# EAGLE board SparkFun LoRaSerial 915MHz - 1W-Panel (EAGLE 9.6.2), part 1 of 5
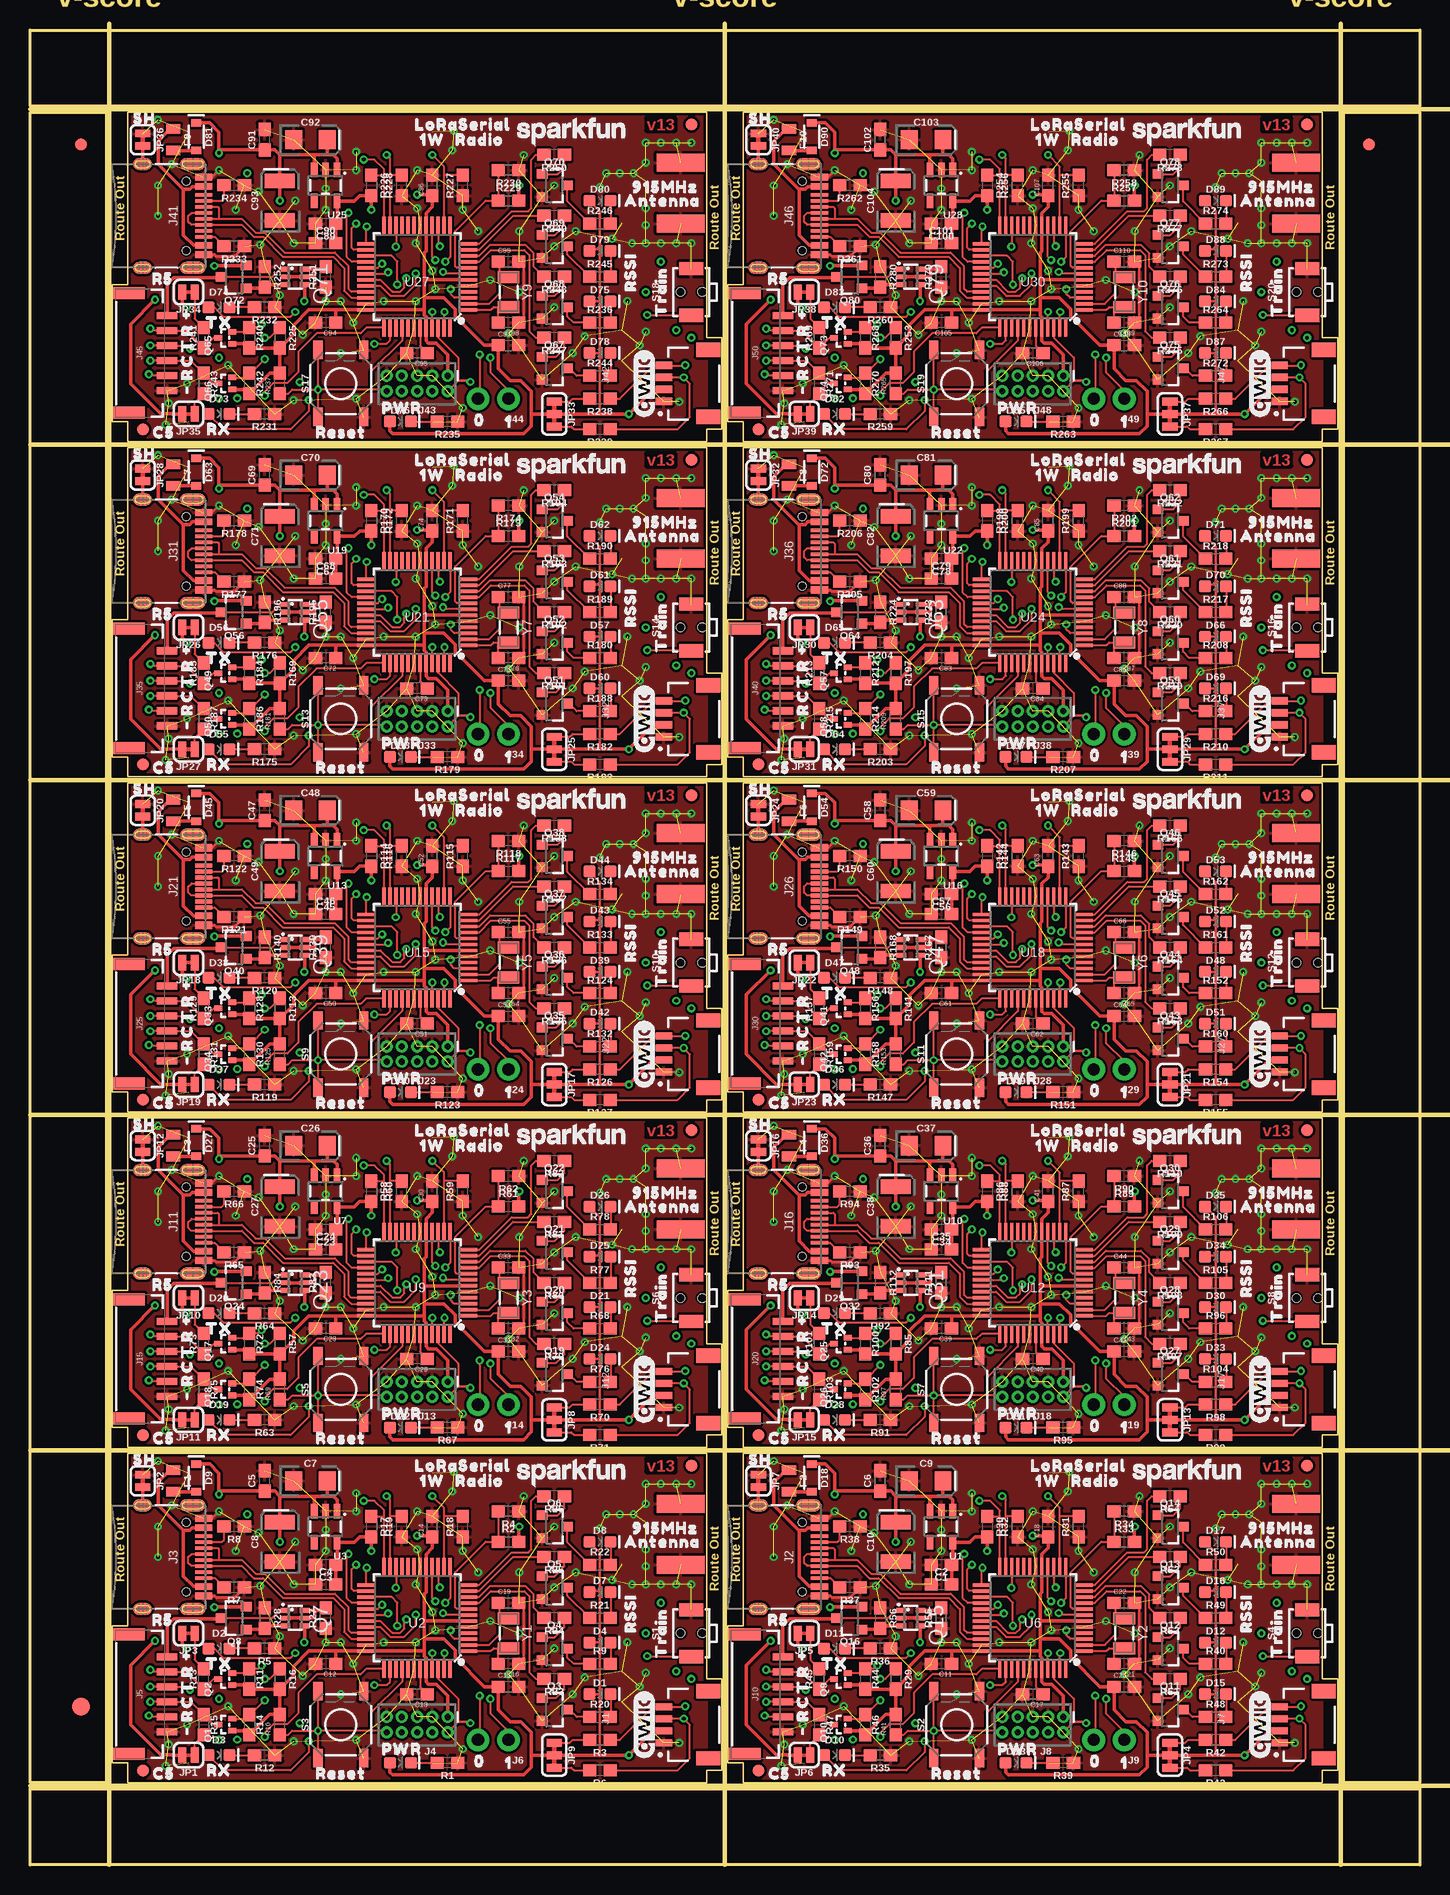
[diagram p0: board, top side]
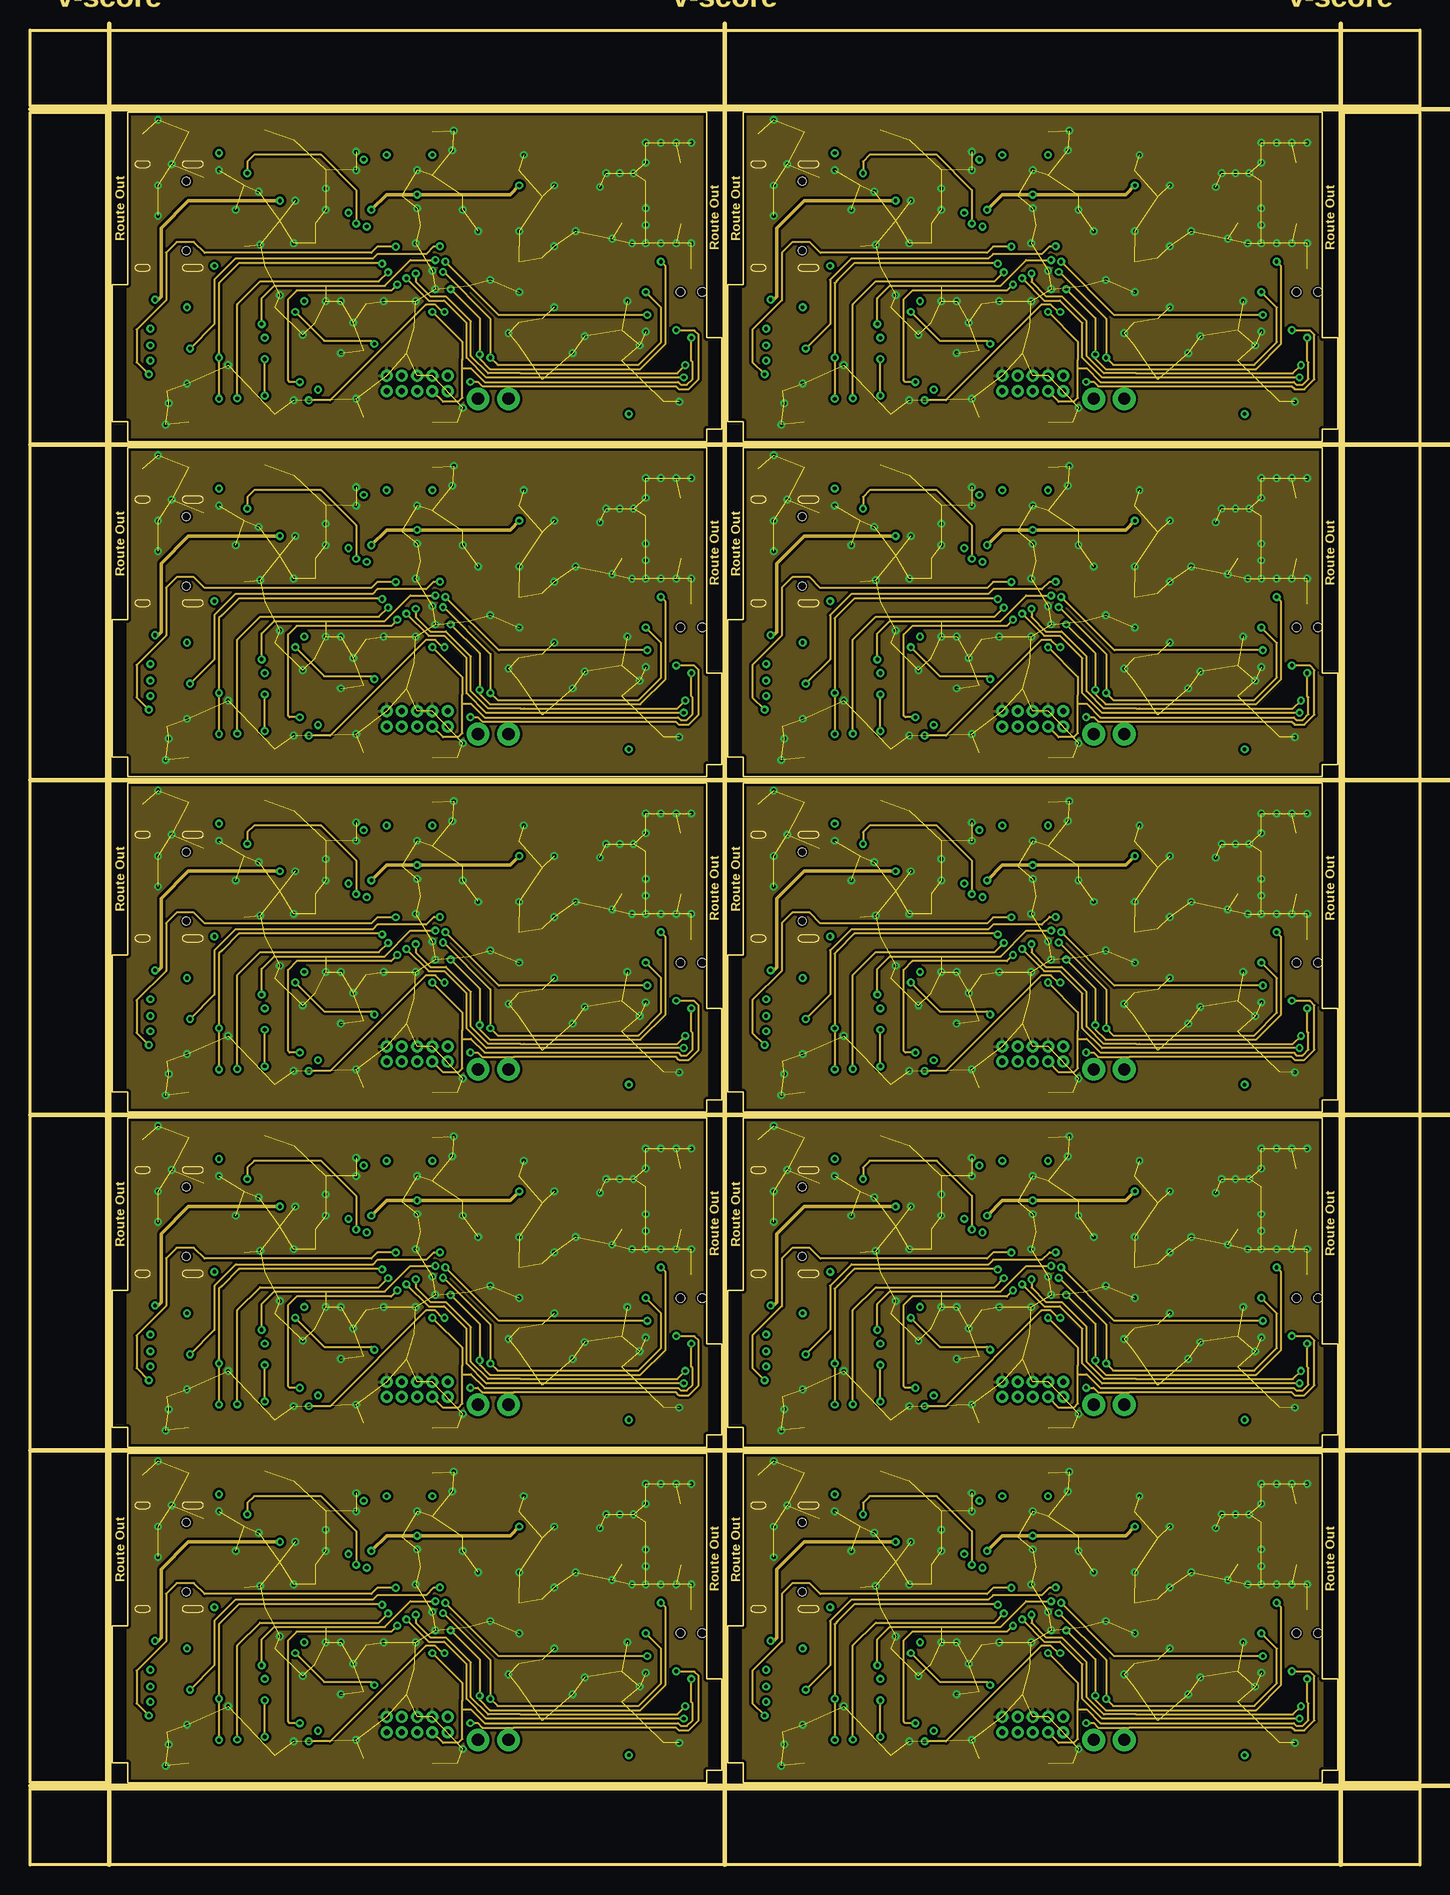
[diagram p1: board, inner layer Route2]
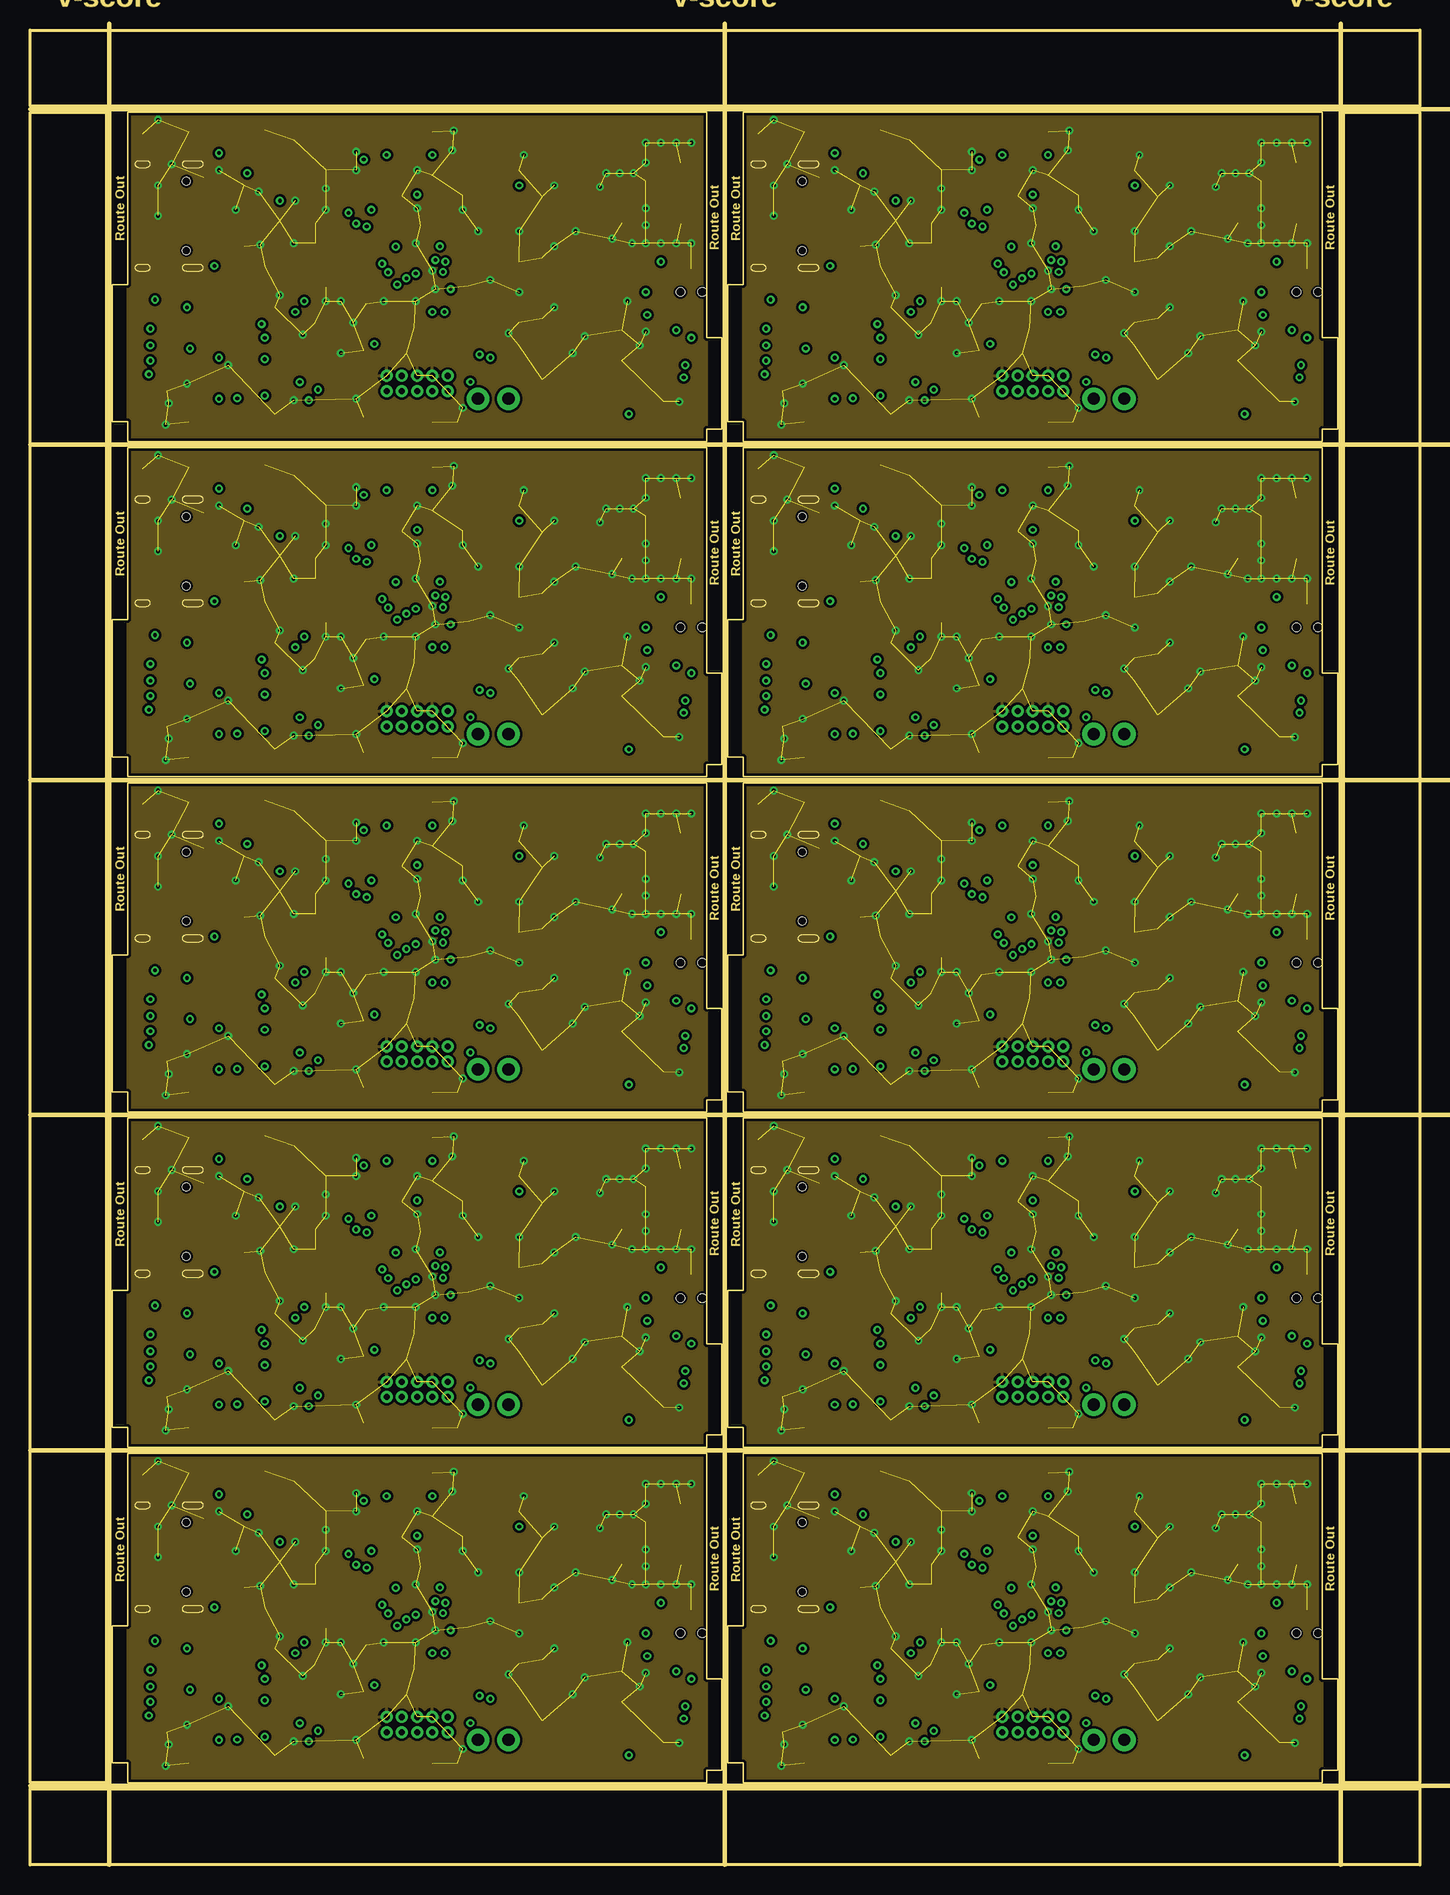
[diagram p2: board, inner layer Route15]
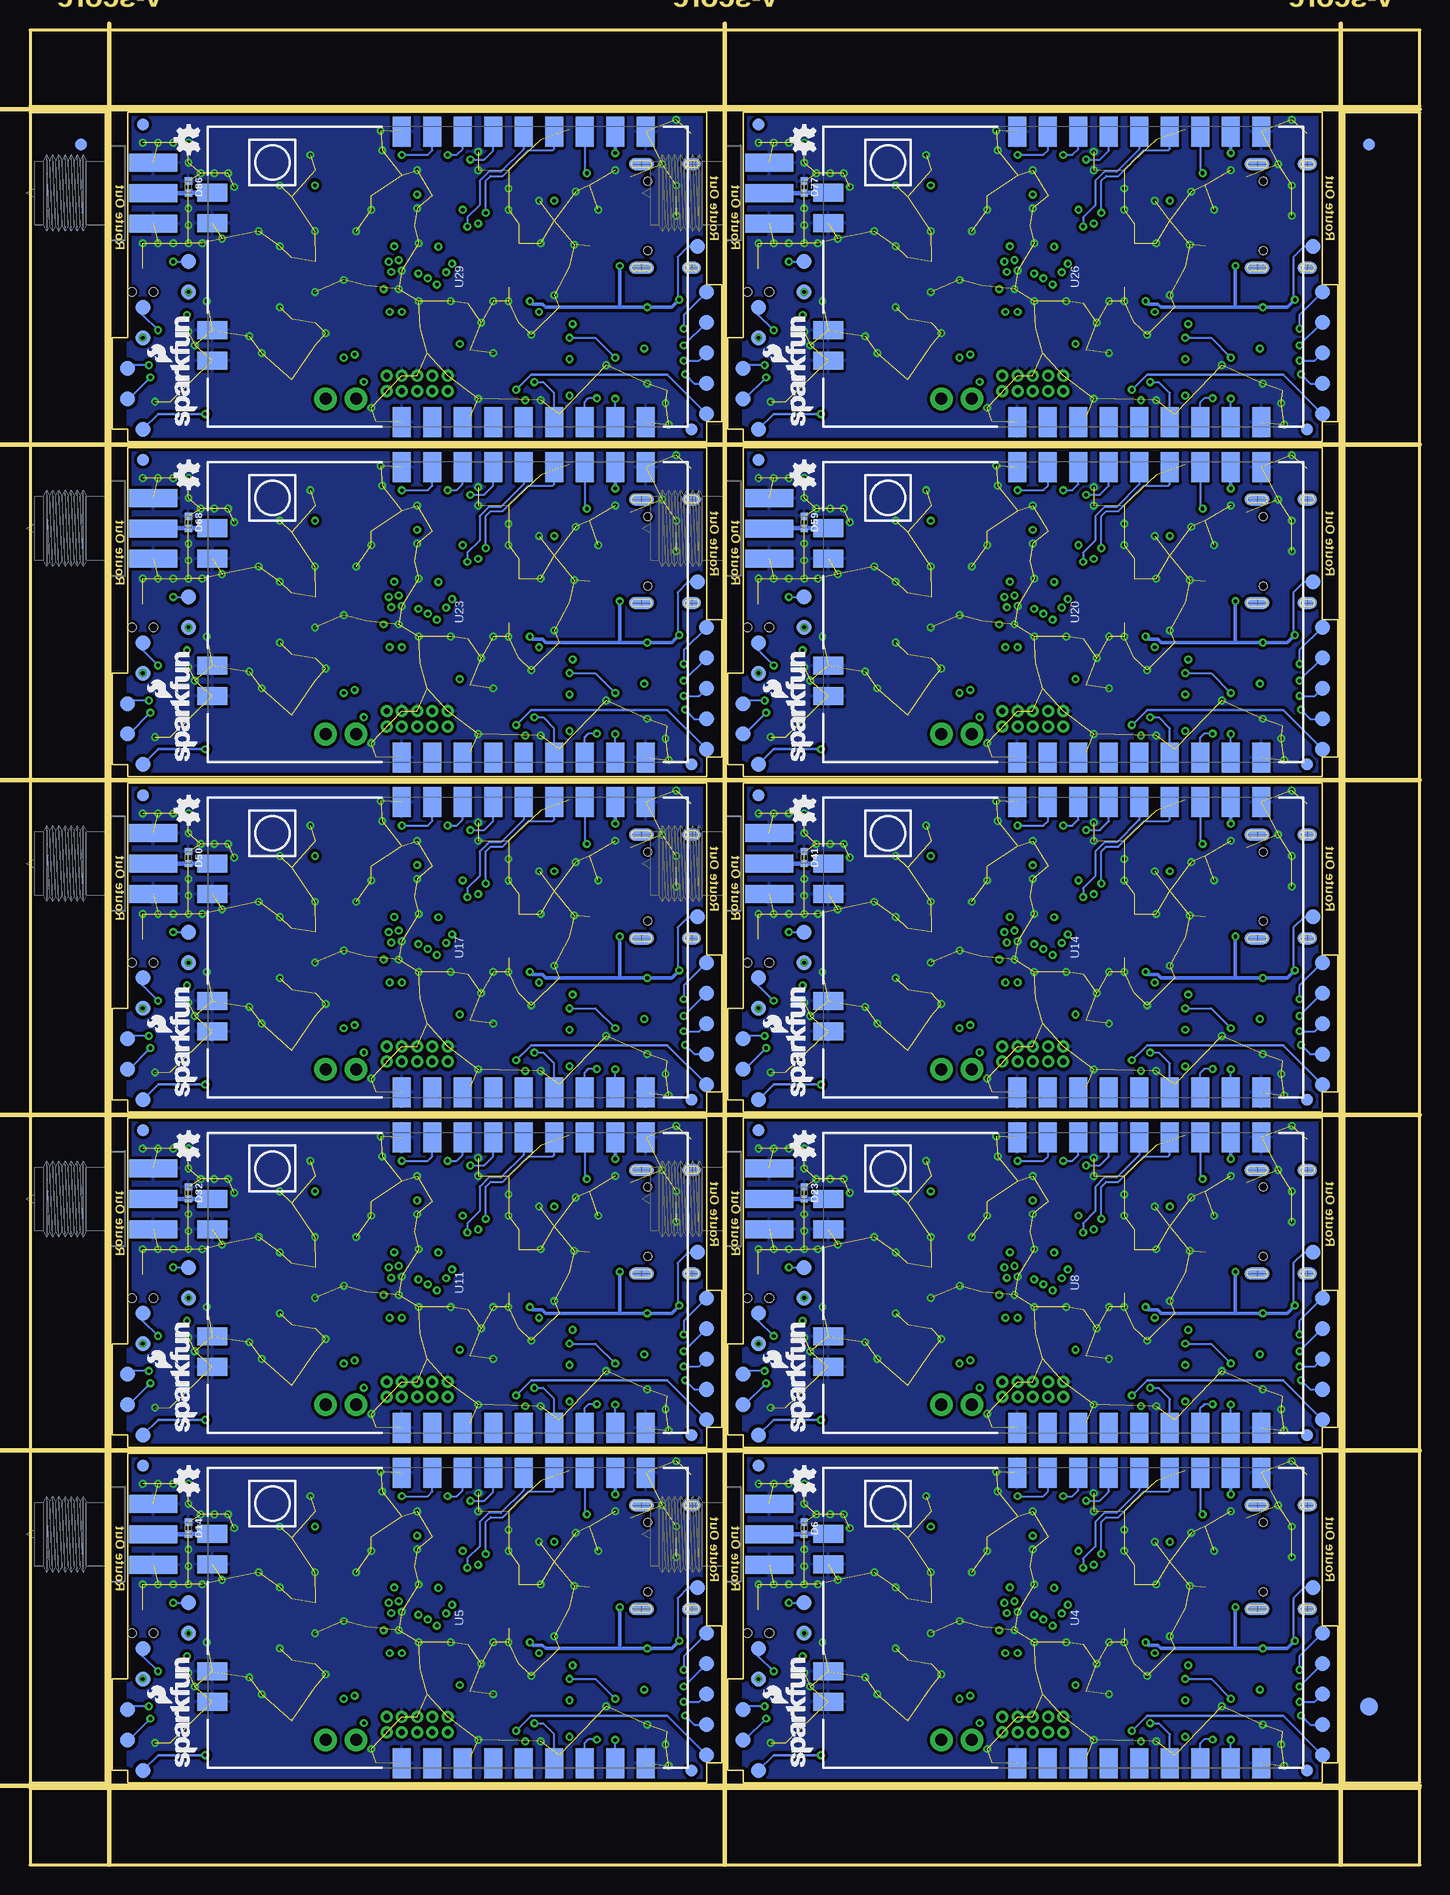
[diagram p3: board, bottom side, seen from below]

Size 115.82 x 152.95 mm. Coordinates in mm from the lower left corner, seen from the top.
Outline: 8.13,6.86 8.13,8.51 6.86,8.51 6.86,19.94 8.13,19.94 8.13,34.3 56.39,34.3 56.39,15.5 57.66,15.5 57.66,7.88 56.39,7.88 56.39,6.86 8.13,6.86
Outline: 59.44,6.86 59.44,8.51 58.17,8.51 58.17,19.94 59.44,19.94 59.44,34.3 107.7,34.3 107.7,15.5 108.97,15.5 108.97,7.88 107.7,7.88 107.7,6.86 59.44,6.86
Outline: 8.13,34.81 8.13,36.46 6.86,36.46 6.86,47.89 8.13,47.89 8.13,62.25 56.39,62.25 56.39,43.45 57.66,43.45 57.66,35.83 56.39,35.83 56.39,34.81 8.13,34.81
Outline: 59.44,34.81 59.44,36.46 58.17,36.46 58.17,47.89 59.44,47.89 59.44,62.25 107.7,62.25 107.7,43.45 108.97,43.45 108.97,35.83 107.7,35.83 107.7,34.81 59.44,34.81
Outline: 8.13,62.75 8.13,64.41 6.86,64.41 6.86,75.84 8.13,75.84 8.13,90.19 56.39,90.19 56.39,71.39 57.66,71.39 57.66,63.77 56.39,63.77 56.39,62.75 8.13,62.75
Outline: 59.44,62.75 59.44,64.41 58.17,64.41 58.17,75.84 59.44,75.84 59.44,90.19 107.7,90.19 107.7,71.39 108.97,71.39 108.97,63.77 107.7,63.77 107.7,62.75 59.44,62.75
Outline: 8.13,90.7 8.13,92.36 6.86,92.36 6.86,103.79 8.13,103.79 8.13,118.14 56.39,118.14 56.39,99.34 57.66,99.34 57.66,91.72 56.39,91.72 56.39,90.7 8.13,90.7
Outline: 59.44,90.7 59.44,92.36 58.17,92.36 58.17,103.79 59.44,103.79 59.44,118.14 107.7,118.14 107.7,99.34 108.97,99.34 108.97,91.72 107.7,91.72 107.7,90.7 59.44,90.7
Outline: 8.13,118.65 8.13,120.31 6.86,120.31 6.86,131.74 8.13,131.74 8.13,146.09 56.39,146.09 56.39,127.29 57.66,127.29 57.66,119.67 56.39,119.67 56.39,118.65 8.13,118.65
Outline: 59.44,118.65 59.44,120.31 58.17,120.31 58.17,131.74 59.44,131.74 59.44,146.09 107.7,146.09 107.7,127.29 108.97,127.29 108.97,119.67 107.7,119.67 107.7,118.65 59.44,118.65
Outline: 0,6.35 115.82,6.35 115.82,0 0,0 0,6.35
Outline: 109.47,146.09 115.82,146.09 115.82,6.86 109.47,6.86 109.47,146.09
Outline: 0,152.95 115.82,152.95 115.82,146.6 0,146.6 0,152.95
Outline: 0,146.09 6.35,146.09 6.35,6.86 0,6.86 0,146.09
Copper layers (1+2*15+16): Top 0.035559375mm / dielectric 0.47751875mm / Route2 0.035559375mm / dielectric 0.47751875mm / Route15 0.035559375mm / dielectric 0.47751875mm / Bottom 0.035559375mm
Design rules "SparkFun LoRaSerial 915MHz - 1W": minimum track width 7mil, minimum drill 12mil, track to track 7mil, track to pad 7mil, pad to pad 7mil, via to via 7mil, smd to smd 7mil, copper to edge 7mil, drill to drill 7mil, minimum pad ring 7mil, minimum via ring 7mil, stop-mask expansion 3mil, vias tented up to drill 25mil, thermal gap 10mil
Milling: 9 lines

## Footprints (pad centres in the part's own frame; a part is rotated, then mirrored left to right if it is on the bottom)
0603 = smd 1.1 x 1: 1 -0.85,0; 2 0.85,0
EIA3216 = smd 1.4 x 1.6: + 1.4,0; - -1.4,0
EIA3528 = smd 1.2 x 2.5: A 1.65,0; C -1.65,0
LED-0603 = smd 1 x 1: A -0.877,0; C 0.877,0
0402-TIGHT = smd 0.6 x 0.6: 1 -0.5,0; 2 0.5,0
SOD-323 = smd 0.63 x 0.83: A 1.15,0; C -1.15,0
RP-SMA-EDGE = smd 1.5 x 4: GND@0 -2.54,0; GND@1 2.54,0; SIG 0,0 | smd 1.5 x 4 bottom: GND@2 -2.54,0; GND@3 2.54,0
FIDUCIAL-1X2 = smd 1 x 1: 1 0,0
FIDUCIAL-1.5X3 = smd 1.5 x 1.5: 1 0,0
0805 = smd 0.8 x 1.2: 1 -0.9,0; 2 0.9,0
JST04_1MM_RA = smd 0.6 x 1.35: 1 -1.5,0; 2 -0.5,0; 3 0.5,0; 4 1.5,0 | smd 1.2 x 2: NC1 2.8,-3.675; NC2 -2.8,-3.675
USB-C-16P = smd 0.3 x 1.45: A5 -1.25,0; A6 -0.25,0; A7 0.25,0; A8 1.25,0; B5 1.75,0; B6 0.75,0; B7 -0.75,0; B8 -1.75,0 | smd 0.6 x 1.45: GND -3.225,0; GND2 3.225,0 | smd 1 x 2.1: SHLD1 -4.32,-0.915; SHLD2 4.32,-0.915 | smd 1 x 2.1 bottom: SHLD3 -4.32,-0.915; SHLD4 4.32,-0.915 | smd 1 x 1.6: SHLD5 -4.32,-5.095; SHLD8 4.32,-5.095 | smd 1 x 1.6 bottom: SHLD6 -4.32,-5.095; SHLD7 4.32,-5.095 | smd 0.55 x 1.45: VBUS1 -2.45,0; VBUS2 2.45,0 | hole 0.65: -2.89,-1.445; 2.89,-1.445
2X5-PTH-1.27MM-NO_SILK = drill 0.508 pad 1: 1 -2.54,-0.635; 2 -2.54,0.635; 3 -1.27,-0.635; 4 -1.27,0.635; 5 0,-0.635; 6 0,0.635; 7 1.27,-0.635; 8 1.27,0.635; 9 2.54,-0.635; 10 2.54,0.635
JST-6-SMD-1.25MM-LOCKING = smd 0.6 x 1.7: 1 -3.125,3.3; 2 -1.875,3.3; 3 -0.625,3.3; 4 0.625,3.3; 5 1.875,3.3; 6 3.125,3.3 | smd 1 x 2.7: NC1 4.975,0.1; NC2 -4.975,0.1
1X02_NO_SILK = drill 1.016 pad 1.88: 1 0,0; 2 2.54,0
SMT-JUMPER_2_NC_TRACE_SILK = smd 0.66 x 1.27: 1 -0.521,0; 2 0.521,0
SMT-JUMPER_3_2-NC_TRACE_SILK = smd 0.66 x 1.27: 1 -1.041,0; 2 0,0; 3 1.041,0
SOT-416FL = smd 0.46 x 0.65: 1 -0.5,-1.1; 2 0.5,-1.1; 3 0,0.05
SOT23-3 = smd 0.8 x 0.9: 1 -0.95,-1; 2 0.95,-1; 3 0,1.1
SOT363_PHILIPS = smd 0.4 x 0.8: 1 -0.65,-0.8; 2 0,-0.8; 3 0.65,-0.8; 4 0.65,0.8; 5 0,0.8; 6 -0.65,0.8
TACTILE_SWITCH_SMD_RIGHT_ANGLE = smd 1.1 x 2: 1 -1.95,0; 2 1.95,0 | hole 0.7: 0,0.9; 0,-0.9
TACTILE_SWITCH_SMD_5.2MM = smd 1.524 x 0.762: 1 -2.794,1.905; 2 2.794,1.905; 3 -2.794,-1.905; 4 2.794,-1.905
PAD.03X.05 = smd 1.27 x 1.27: 1 0,0
SOT23-5 = smd 0.55 x 1.2: 1 -0.95,-1.3; 2 0,-1.3; 3 0.95,-1.3; 4 0.95,1.3; 5 -0.95,1.3
TQFP-48 = smd 1.5 x 0.28: 1 -4.25,2.75; 2 -4.25,2.25; 3 -4.25,1.75; 4 -4.25,1.25; 5 -4.25,0.75; 6 -4.25,0.25; 7 -4.25,-0.25; 8 -4.25,-0.75; 9 -4.25,-1.25; 10 -4.25,-1.75; 11 -4.25,-2.25; 12 -4.25,-2.75; 25 4.25,-2.75; 26 4.25,-2.25; 27 4.25,-1.75; 28 4.25,-1.25; 29 4.25,-0.75; 30 4.25,-0.25; 31 4.25,0.25; 32 4.25,0.75; 33 4.25,1.25; 34 4.25,1.75; 35 4.25,2.25; 36 4.25,2.75 | smd 0.28 x 1.5: 13 -2.75,-4.25; 14 -2.25,-4.25; 15 -1.75,-4.25; 16 -1.25,-4.25; 17 -0.75,-4.25; 18 -0.25,-4.25; 19 0.25,-4.25; 20 0.75,-4.25; 21 1.25,-4.25; 22 1.75,-4.25; 23 2.25,-4.25; 24 2.75,-4.25; 37 2.75,4.25; 38 2.25,4.25; 39 1.75,4.25; 40 1.25,4.25; 41 0.75,4.25; 42 0.25,4.25; 43 -0.25,4.25; 44 -0.75,4.25; 45 -1.25,4.25; 46 -1.75,4.25; 47 -2.25,4.25; 48 -2.75,4.25
E19-915M30S = smd 2.5 x 1.5: 1 12.1,-3.82; 2 12.1,-1.28; 3 12.1,1.26; 4 12.1,3.8; 5 12.1,6.34; 6 12.1,8.88; 7 12.1,11.42; 8 12.1,13.96; 9 12.1,16.5; 10 -12.1,16.5; 11 -12.1,13.96; 12 -12.1,11.42; 13 -12.1,8.88; 14 -12.1,6.34; 15 -12.1,3.8; 16 -12.1,1.26; 17 -12.1,-1.28; 18 -12.1,-3.82 | smd 1.5 x 2.5: 19 -7,-19.6; 20 -4.46,-19.6; 21 4.46,-19.6; 22 7,-19.6
CRYSTAL-SMD-3.2X1.5MM = smd 1 x 1.8: P$1 -1.25,0; P$2 1.25,0

## Placement (x,y rotation side)
C1  1.0uF  [0603]  75.95,25.02 180 top
C2  0.1uF  [0603]  75.95,23.37 0 top
C3  1.0uF  [0603]  24.64,25.02 180 top
C4  0.1uF  [0603]  24.64,23.37 0 top
C5  1.0uF  [0603]  19.56,32.01 90 top
C6  1.0uF  [0603]  70.87,32.01 90 top
C7  10uF  [EIA3216]  23.37,32.01 0 top
C8  47uF  [EIA3528]  20.83,26.93 90 top
C9  10uF  [EIA3216]  74.68,32.01 0 top
C10  47uF  [EIA3528]  72.14,26.93 90 top
C11  0.1uF  [0603]  75.95,16.77 180 top
C12  0.1uF  [0603]  24.64,16.77 180 top
C13  0.1uF  [0603]  32.26,14.23 180 top
C14  0.1uF  [0603]  33.53,28.2 90 top
C15  0.1uF  [0603]  39.88,14.86 0 top
C16  15pF  [0603]  39.88,16.77 180 top
C17  0.1uF  [0603]  83.57,14.23 180 top
C18  0.1uF  [0603]  84.84,28.2 90 top
C19  15pF  [0603]  39.88,21.85 0 top
C20  0.1uF  [0603]  91.19,14.86 0 top
C21  15pF  [0603]  91.19,16.77 180 top
C22  15pF  [0603]  91.19,21.85 0 top
C23  1.0uF  [0603]  24.64,52.97 180 top
C24  0.1uF  [0603]  24.64,51.32 0 top
C25  1.0uF  [0603]  19.56,59.96 90 top
C26  10uF  [EIA3216]  23.37,59.96 0 top
C27  47uF  [EIA3528]  20.83,54.88 90 top
C28  0.1uF  [0603]  24.64,44.72 180 top
C29  0.1uF  [0603]  32.26,42.18 180 top
C30  0.1uF  [0603]  33.53,56.15 90 top
C31  0.1uF  [0603]  39.88,42.81 0 top
C32  15pF  [0603]  39.88,44.72 180 top
C33  15pF  [0603]  39.88,49.8 0 top
C34  1.0uF  [0603]  75.95,52.97 180 top
C35  0.1uF  [0603]  75.95,51.32 0 top
C36  1.0uF  [0603]  70.87,59.96 90 top
C37  10uF  [EIA3216]  74.68,59.96 0 top
C38  47uF  [EIA3528]  72.14,54.88 90 top
C39  0.1uF  [0603]  75.95,44.72 180 top
C40  0.1uF  [0603]  83.57,42.18 180 top
C41  0.1uF  [0603]  84.84,56.15 90 top
C42  0.1uF  [0603]  91.19,42.81 0 top
C43  15pF  [0603]  91.19,44.72 180 top
C44  15pF  [0603]  91.19,49.8 0 top
C45  1.0uF  [0603]  24.64,80.92 180 top
C46  0.1uF  [0603]  24.64,79.27 0 top
C47  1.0uF  [0603]  19.56,87.9 90 top
C48  10uF  [EIA3216]  23.37,87.9 0 top
C49  47uF  [EIA3528]  20.83,82.82 90 top
C50  0.1uF  [0603]  24.64,72.66 180 top
C51  0.1uF  [0603]  32.26,70.12 180 top
C52  0.1uF  [0603]  33.53,84.09 90 top
C53  0.1uF  [0603]  39.88,70.76 0 top
C54  15pF  [0603]  39.88,72.66 180 top
C55  15pF  [0603]  39.88,77.74 0 top
C56  1.0uF  [0603]  75.95,80.92 180 top
C57  0.1uF  [0603]  75.95,79.27 0 top
C58  1.0uF  [0603]  70.87,87.9 90 top
C59  10uF  [EIA3216]  74.68,87.9 0 top
C60  47uF  [EIA3528]  72.14,82.82 90 top
C61  0.1uF  [0603]  75.95,72.66 180 top
C62  0.1uF  [0603]  83.57,70.12 180 top
C63  0.1uF  [0603]  84.84,84.09 90 top
C64  0.1uF  [0603]  91.19,70.76 0 top
C65  15pF  [0603]  91.19,72.66 180 top
C66  15pF  [0603]  91.19,77.74 0 top
C67  1.0uF  [0603]  24.64,108.87 180 top
C68  0.1uF  [0603]  24.64,107.22 0 top
C69  1.0uF  [0603]  19.56,115.85 90 top
C70  10uF  [EIA3216]  23.37,115.85 0 top
C71  47uF  [EIA3528]  20.83,110.77 90 top
C72  0.1uF  [0603]  24.64,100.61 180 top
C73  0.1uF  [0603]  32.26,98.07 180 top
C74  0.1uF  [0603]  33.53,112.04 90 top
C75  0.1uF  [0603]  39.88,98.71 0 top
C76  15pF  [0603]  39.88,100.61 180 top
C77  15pF  [0603]  39.88,105.69 0 top
C78  1.0uF  [0603]  75.95,108.87 180 top
C79  0.1uF  [0603]  75.95,107.22 0 top
C80  1.0uF  [0603]  70.87,115.85 90 top
C81  10uF  [EIA3216]  74.68,115.85 0 top
C82  47uF  [EIA3528]  72.14,110.77 90 top
C83  0.1uF  [0603]  75.95,100.61 180 top
C84  0.1uF  [0603]  83.57,98.07 180 top
C85  0.1uF  [0603]  84.84,112.04 90 top
C86  0.1uF  [0603]  91.19,98.71 0 top
C87  15pF  [0603]  91.19,100.61 180 top
C88  15pF  [0603]  91.19,105.69 0 top
C89  1.0uF  [0603]  24.64,136.82 180 top
C90  0.1uF  [0603]  24.64,135.17 0 top
C91  1.0uF  [0603]  19.56,143.8 90 top
C92  10uF  [EIA3216]  23.37,143.8 0 top
C93  47uF  [EIA3528]  20.83,138.72 90 top
C94  0.1uF  [0603]  24.64,128.56 180 top
C95  0.1uF  [0603]  32.26,126.02 180 top
C96  0.1uF  [0603]  33.53,139.99 90 top
C97  0.1uF  [0603]  39.88,126.66 0 top
C98  15pF  [0603]  39.88,128.56 180 top
C99  15pF  [0603]  39.88,133.64 0 top
C100  1.0uF  [0603]  75.95,136.82 180 top
C101  0.1uF  [0603]  75.95,135.17 0 top
C102  1.0uF  [0603]  70.87,143.8 90 top
C103  10uF  [EIA3216]  74.68,143.8 0 top
C104  47uF  [EIA3528]  72.14,138.72 90 top
C105  0.1uF  [0603]  75.95,128.56 180 top
C106  0.1uF  [0603]  83.57,126.02 180 top
C107  0.1uF  [0603]  84.84,139.99 90 top
C108  0.1uF  [0603]  91.19,126.66 0 top
C109  15pF  [0603]  91.19,128.56 180 top
C110  15pF  [0603]  91.19,133.64 0 top
D1  GREEN  [LED-0603]  47.5,14.23 0 top
D2  BLUE  [LED-0603]  15.75,18.04 0 top
D3  Yellow  [LED-0603]  15.75,9.15 0 top
D4  GREEN  [LED-0603]  47.5,18.55 0 top
D5  RED  [LED-0603]  30.86,8.51 0 top
D6  PESD0402  [0402-TIGHT]  51.31,28.07 270 bottom
D7  GREEN  [LED-0603]  47.5,22.74 0 top
D8  GREEN  [LED-0603]  47.5,26.93 0 top
D9  3A/10V/280mV  [SOD-323]  13.84,32.26 270 top
D10  Yellow  [LED-0603]  67.06,9.15 0 top
D11  BLUE  [LED-0603]  67.06,18.04 0 top
D12  GREEN  [LED-0603]  98.81,18.55 0 top
D13  RED  [LED-0603]  82.17,8.51 0 top
D14  PESD0402  [0402-TIGHT]  102.62,28.07 270 bottom
D15  GREEN  [LED-0603]  98.81,14.23 0 top
D16  GREEN  [LED-0603]  98.81,22.74 0 top
D17  GREEN  [LED-0603]  98.81,26.93 0 top
D18  3A/10V/280mV  [SOD-323]  65.15,32.26 270 top
D19  Yellow  [LED-0603]  15.75,37.1 0 top
D20  BLUE  [LED-0603]  15.75,45.99 0 top
D21  GREEN  [LED-0603]  47.5,46.49 0 top
D22  RED  [LED-0603]  30.86,36.46 0 top
D23  PESD0402  [0402-TIGHT]  51.31,56.02 270 bottom
D24  GREEN  [LED-0603]  47.5,42.18 0 top
D25  GREEN  [LED-0603]  47.5,50.69 0 top
D26  GREEN  [LED-0603]  47.5,54.88 0 top
D27  3A/10V/280mV  [SOD-323]  13.84,60.21 270 top
D28  Yellow  [LED-0603]  67.06,37.1 0 top
D29  BLUE  [LED-0603]  67.06,45.99 0 top
D30  GREEN  [LED-0603]  98.81,46.49 0 top
D31  RED  [LED-0603]  82.17,36.46 0 top
D32  PESD0402  [0402-TIGHT]  102.62,56.02 270 bottom
D33  GREEN  [LED-0603]  98.81,42.18 0 top
D34  GREEN  [LED-0603]  98.81,50.69 0 top
D35  GREEN  [LED-0603]  98.81,54.88 0 top
D36  3A/10V/280mV  [SOD-323]  65.15,60.21 270 top
D37  Yellow  [LED-0603]  15.75,65.04 0 top
D38  BLUE  [LED-0603]  15.75,73.93 0 top
D39  GREEN  [LED-0603]  47.5,74.44 0 top
D40  RED  [LED-0603]  30.86,64.41 0 top
D41  PESD0402  [0402-TIGHT]  51.31,83.97 270 bottom
D42  GREEN  [LED-0603]  47.5,70.12 0 top
D43  GREEN  [LED-0603]  47.5,78.63 0 top
D44  GREEN  [LED-0603]  47.5,82.82 0 top
D45  3A/10V/280mV  [SOD-323]  13.84,88.16 270 top
D46  Yellow  [LED-0603]  67.06,65.04 0 top
D47  BLUE  [LED-0603]  67.06,73.93 0 top
D48  GREEN  [LED-0603]  98.81,74.44 0 top
D49  RED  [LED-0603]  82.17,64.41 0 top
D50  PESD0402  [0402-TIGHT]  102.62,83.97 270 bottom
D51  GREEN  [LED-0603]  98.81,70.12 0 top
D52  GREEN  [LED-0603]  98.81,78.63 0 top
D53  GREEN  [LED-0603]  98.81,82.82 0 top
D54  3A/10V/280mV  [SOD-323]  65.15,88.16 270 top
D55  Yellow  [LED-0603]  15.75,92.99 0 top
D56  BLUE  [LED-0603]  15.75,101.88 0 top
D57  GREEN  [LED-0603]  47.5,102.39 0 top
D58  RED  [LED-0603]  30.86,92.36 0 top
D59  PESD0402  [0402-TIGHT]  51.31,111.91 270 bottom
D60  GREEN  [LED-0603]  47.5,98.07 0 top
D61  GREEN  [LED-0603]  47.5,106.58 0 top
D62  GREEN  [LED-0603]  47.5,110.77 0 top
D63  3A/10V/280mV  [SOD-323]  13.84,116.11 270 top
D64  Yellow  [LED-0603]  67.06,92.99 0 top
D65  BLUE  [LED-0603]  67.06,101.88 0 top
D66  GREEN  [LED-0603]  98.81,102.39 0 top
D67  RED  [LED-0603]  82.17,92.36 0 top
D68  PESD0402  [0402-TIGHT]  102.62,111.91 270 bottom
D69  GREEN  [LED-0603]  98.81,98.07 0 top
D70  GREEN  [LED-0603]  98.81,106.58 0 top
D71  GREEN  [LED-0603]  98.81,110.77 0 top
D72  3A/10V/280mV  [SOD-323]  65.15,116.11 270 top
D73  Yellow  [LED-0603]  15.75,120.94 0 top
D74  BLUE  [LED-0603]  15.75,129.83 0 top
D75  GREEN  [LED-0603]  47.5,130.34 0 top
D76  RED  [LED-0603]  30.86,120.31 0 top
D77  PESD0402  [0402-TIGHT]  51.31,139.87 270 bottom
D78  GREEN  [LED-0603]  47.5,126.02 0 top
D79  GREEN  [LED-0603]  47.5,134.53 0 top
D80  GREEN  [LED-0603]  47.5,138.72 0 top
D81  3A/10V/280mV  [SOD-323]  13.84,144.06 270 top
D82  Yellow  [LED-0603]  67.06,120.94 0 top
D83  BLUE  [LED-0603]  67.06,129.83 0 top
D84  GREEN  [LED-0603]  98.81,130.34 0 top
D85  RED  [LED-0603]  82.17,120.31 0 top
D86  PESD0402  [0402-TIGHT]  102.62,139.87 270 bottom
D87  GREEN  [LED-0603]  98.81,126.02 0 top
D88  GREEN  [LED-0603]  98.81,134.53 0 top
D89  GREEN  [LED-0603]  98.81,138.72 0 top
D90  3A/10V/280mV  [SOD-323]  65.15,144.06 270 top
E1  RP-SMA  [RP-SMA-EDGE]  105.54,27.56 90 bottom
E2  RP-SMA  [RP-SMA-EDGE]  54.23,27.56 90 bottom
E3  RP-SMA  [RP-SMA-EDGE]  54.23,55.51 90 bottom
E4  RP-SMA  [RP-SMA-EDGE]  105.54,55.51 90 bottom
E5  RP-SMA  [RP-SMA-EDGE]  54.23,83.46 90 bottom
E6  RP-SMA  [RP-SMA-EDGE]  105.54,83.46 90 bottom
E7  RP-SMA  [RP-SMA-EDGE]  54.23,111.41 90 bottom
E8  RP-SMA  [RP-SMA-EDGE]  105.54,111.41 90 bottom
E9  RP-SMA  [RP-SMA-EDGE]  54.23,139.36 90 bottom
E10  RP-SMA  [RP-SMA-EDGE]  105.54,139.36 90 bottom
E$1  [FIDUCIAL-1X2]  4.23,143.42 0 top
E$2  [FIDUCIAL-1X2]  4.23,143.42 0 bottom
E$3  [FIDUCIAL-1X2]  111.59,143.42 0 top
E$4  [FIDUCIAL-1X2]  111.59,143.42 0 bottom
E$5  [FIDUCIAL-1.5X3]  4.23,13.21 0 top
E$6  [FIDUCIAL-1.5X3]  4.23,13.21 0 bottom
F1  6V 0.5A  [0805]  11.94,32.01 270 top
F2  6V 0.5A  [0805]  63.25,32.01 270 top
F3  6V 0.5A  [0805]  11.94,59.96 270 top
F4  6V 0.5A  [0805]  63.25,59.96 270 top
F5  6V 0.5A  [0805]  11.94,87.9 270 top
F6  6V 0.5A  [0805]  63.25,87.9 270 top
F7  6V 0.5A  [0805]  11.94,115.85 270 top
F8  6V 0.5A  [0805]  63.25,115.85 270 top
F9  6V 0.5A  [0805]  11.94,143.8 270 top
F10  6V 0.5A  [0805]  63.25,143.8 270 top
FID1  FIDUCIAL1X2  [FIDUCIAL-1X2]  9.4,7.88 0 bottom
FID2  FIDUCIAL1X2  [FIDUCIAL-1X2]  55.12,33.28 0 bottom
FID3  FIDUCIAL1X2  [FIDUCIAL-1X2]  55.12,33.28 0 top
FID4  FIDUCIAL1X2  [FIDUCIAL-1X2]  9.4,7.88 0 top
FID5  FIDUCIAL1X2  [FIDUCIAL-1X2]  60.71,7.88 0 bottom
FID6  FIDUCIAL1X2  [FIDUCIAL-1X2]  106.43,33.28 0 bottom
FID7  FIDUCIAL1X2  [FIDUCIAL-1X2]  106.43,33.28 0 top
FID8  FIDUCIAL1X2  [FIDUCIAL-1X2]  60.71,7.88 0 top
FID9  FIDUCIAL1X2  [FIDUCIAL-1X2]  9.4,35.83 0 bottom
FID10  FIDUCIAL1X2  [FIDUCIAL-1X2]  55.12,61.23 0 bottom
FID11  FIDUCIAL1X2  [FIDUCIAL-1X2]  55.12,61.23 0 top
FID12  FIDUCIAL1X2  [FIDUCIAL-1X2]  9.4,35.83 0 top
FID13  FIDUCIAL1X2  [FIDUCIAL-1X2]  60.71,35.83 0 bottom
FID14  FIDUCIAL1X2  [FIDUCIAL-1X2]  106.43,61.23 0 bottom
FID15  FIDUCIAL1X2  [FIDUCIAL-1X2]  106.43,61.23 0 top
FID16  FIDUCIAL1X2  [FIDUCIAL-1X2]  60.71,35.83 0 top
FID17  FIDUCIAL1X2  [FIDUCIAL-1X2]  9.4,63.77 0 bottom
FID18  FIDUCIAL1X2  [FIDUCIAL-1X2]  55.12,89.17 0 bottom
FID19  FIDUCIAL1X2  [FIDUCIAL-1X2]  55.12,89.17 0 top
FID20  FIDUCIAL1X2  [FIDUCIAL-1X2]  9.4,63.77 0 top
FID21  FIDUCIAL1X2  [FIDUCIAL-1X2]  60.71,63.77 0 bottom
FID22  FIDUCIAL1X2  [FIDUCIAL-1X2]  106.43,89.17 0 bottom
FID23  FIDUCIAL1X2  [FIDUCIAL-1X2]  106.43,89.17 0 top
FID24  FIDUCIAL1X2  [FIDUCIAL-1X2]  60.71,63.77 0 top
FID25  FIDUCIAL1X2  [FIDUCIAL-1X2]  9.4,91.72 0 bottom
FID26  FIDUCIAL1X2  [FIDUCIAL-1X2]  55.12,117.12 0 bottom
FID27  FIDUCIAL1X2  [FIDUCIAL-1X2]  55.12,117.12 0 top
FID28  FIDUCIAL1X2  [FIDUCIAL-1X2]  9.4,91.72 0 top
FID29  FIDUCIAL1X2  [FIDUCIAL-1X2]  60.71,91.72 0 bottom
FID30  FIDUCIAL1X2  [FIDUCIAL-1X2]  106.43,117.12 0 bottom
FID31  FIDUCIAL1X2  [FIDUCIAL-1X2]  106.43,117.12 0 top
FID32  FIDUCIAL1X2  [FIDUCIAL-1X2]  60.71,91.72 0 top
FID33  FIDUCIAL1X2  [FIDUCIAL-1X2]  9.4,119.67 0 bottom
FID34  FIDUCIAL1X2  [FIDUCIAL-1X2]  55.12,145.07 0 bottom
FID35  FIDUCIAL1X2  [FIDUCIAL-1X2]  55.12,145.07 0 top
FID36  FIDUCIAL1X2  [FIDUCIAL-1X2]  9.4,119.67 0 top
FID37  FIDUCIAL1X2  [FIDUCIAL-1X2]  60.71,119.67 0 bottom
FID38  FIDUCIAL1X2  [FIDUCIAL-1X2]  106.43,145.07 0 bottom
FID39  FIDUCIAL1X2  [FIDUCIAL-1X2]  106.43,145.07 0 top
FID40  FIDUCIAL1X2  [FIDUCIAL-1X2]  60.71,119.67 0 top
J1  QWIIC_RIGHT_ANGLE  [JST04_1MM_RA]  52.83,11.69 90 top
J2  USB C  [USB-C-16P]  65.79,25.66 270 top
J3  USB C  [USB-C-16P]  14.48,25.66 270 top
J4  JTAG  [2X5-PTH-1.27MM-NO_SILK]  32.26,11.69 180 top
J5  [JST-6-SMD-1.25MM-LOCKING]  8.13,14.23 270 top
J6  [1X02_NO_SILK]  39.88,10.42 180 top
J7  QWIIC_RIGHT_ANGLE  [JST04_1MM_RA]  104.14,11.69 90 top
J8  JTAG  [2X5-PTH-1.27MM-NO_SILK]  83.57,11.69 180 top
J9  [1X02_NO_SILK]  91.19,10.42 180 top
J10  [JST-6-SMD-1.25MM-LOCKING]  59.44,14.23 270 top
J11  USB C  [USB-C-16P]  14.48,53.61 270 top
J12  QWIIC_RIGHT_ANGLE  [JST04_1MM_RA]  52.83,39.64 90 top
J13  JTAG  [2X5-PTH-1.27MM-NO_SILK]  32.26,39.64 180 top
J14  [1X02_NO_SILK]  39.88,38.37 180 top
J15  [JST-6-SMD-1.25MM-LOCKING]  8.13,42.18 270 top
J16  USB C  [USB-C-16P]  65.79,53.61 270 top
J17  QWIIC_RIGHT_ANGLE  [JST04_1MM_RA]  104.14,39.64 90 top
J18  JTAG  [2X5-PTH-1.27MM-NO_SILK]  83.57,39.64 180 top
J19  [1X02_NO_SILK]  91.19,38.37 180 top
J20  [JST-6-SMD-1.25MM-LOCKING]  59.44,42.18 270 top
J21  USB C  [USB-C-16P]  14.48,81.55 270 top
J22  QWIIC_RIGHT_ANGLE  [JST04_1MM_RA]  52.83,67.58 90 top
J23  JTAG  [2X5-PTH-1.27MM-NO_SILK]  32.26,67.58 180 top
J24  [1X02_NO_SILK]  39.88,66.31 180 top
J25  [JST-6-SMD-1.25MM-LOCKING]  8.13,70.12 270 top
J26  USB C  [USB-C-16P]  65.79,81.55 270 top
J27  QWIIC_RIGHT_ANGLE  [JST04_1MM_RA]  104.14,67.58 90 top
J28  JTAG  [2X5-PTH-1.27MM-NO_SILK]  83.57,67.58 180 top
J29  [1X02_NO_SILK]  91.19,66.31 180 top
J30  [JST-6-SMD-1.25MM-LOCKING]  59.44,70.12 270 top
J31  USB C  [USB-C-16P]  14.48,109.5 270 top
J32  QWIIC_RIGHT_ANGLE  [JST04_1MM_RA]  52.83,95.53 90 top
J33  JTAG  [2X5-PTH-1.27MM-NO_SILK]  32.26,95.53 180 top
J34  [1X02_NO_SILK]  39.88,94.26 180 top
J35  [JST-6-SMD-1.25MM-LOCKING]  8.13,98.07 270 top
J36  USB C  [USB-C-16P]  65.79,109.5 270 top
J37  QWIIC_RIGHT_ANGLE  [JST04_1MM_RA]  104.14,95.53 90 top
J38  JTAG  [2X5-PTH-1.27MM-NO_SILK]  83.57,95.53 180 top
J39  [1X02_NO_SILK]  91.19,94.26 180 top
J40  [JST-6-SMD-1.25MM-LOCKING]  59.44,98.07 270 top
J41  USB C  [USB-C-16P]  14.48,137.45 270 top
J42  QWIIC_RIGHT_ANGLE  [JST04_1MM_RA]  52.83,123.48 90 top
J43  JTAG  [2X5-PTH-1.27MM-NO_SILK]  32.26,123.48 180 top
J44  [1X02_NO_SILK]  39.88,122.21 180 top
J45  [JST-6-SMD-1.25MM-LOCKING]  8.13,126.02 270 top
J46  USB C  [USB-C-16P]  65.79,137.45 270 top
J47  QWIIC_RIGHT_ANGLE  [JST04_1MM_RA]  104.14,123.48 90 top
J48  JTAG  [2X5-PTH-1.27MM-NO_SILK]  83.57,123.48 180 top
J49  [1X02_NO_SILK]  91.19,122.21 180 top
J50  [JST-6-SMD-1.25MM-LOCKING]  59.44,126.02 270 top
JP1  JUMPER-SMT_2_NC_TRACE_SILK  [SMT-JUMPER_2_NC_TRACE_SILK]  13.21,9.15 180 top
JP2  [SMT-JUMPER_2_NC_TRACE_SILK]  9.4,32.01 270 top
JP3  JUMPER-SMT_2_NC_TRACE_SILK  [SMT-JUMPER_2_NC_TRACE_SILK]  13.21,19.31 180 top
JP4  JUMPER-SMT_3_2-NC_TRACE_SILK  [SMT-JUMPER_3_2-NC_TRACE_SILK]  95,9.15 270 top
JP5  JUMPER-SMT_2_NC_TRACE_SILK  [SMT-JUMPER_2_NC_TRACE_SILK]  64.52,19.31 180 top
JP6  JUMPER-SMT_2_NC_TRACE_SILK  [SMT-JUMPER_2_NC_TRACE_SILK]  64.52,9.15 180 top
JP7  [SMT-JUMPER_2_NC_TRACE_SILK]  60.71,32.01 270 top
JP8  JUMPER-SMT_3_2-NC_TRACE_SILK  [SMT-JUMPER_3_2-NC_TRACE_SILK]  43.69,37.1 270 top
JP9  JUMPER-SMT_3_2-NC_TRACE_SILK  [SMT-JUMPER_3_2-NC_TRACE_SILK]  43.69,9.15 270 top
JP10  JUMPER-SMT_2_NC_TRACE_SILK  [SMT-JUMPER_2_NC_TRACE_SILK]  13.21,47.26 180 top
JP11  JUMPER-SMT_2_NC_TRACE_SILK  [SMT-JUMPER_2_NC_TRACE_SILK]  13.21,37.1 180 top
JP12  [SMT-JUMPER_2_NC_TRACE_SILK]  9.4,59.96 270 top
JP13  JUMPER-SMT_3_2-NC_TRACE_SILK  [SMT-JUMPER_3_2-NC_TRACE_SILK]  95,37.1 270 top
JP14  JUMPER-SMT_2_NC_TRACE_SILK  [SMT-JUMPER_2_NC_TRACE_SILK]  64.52,47.26 180 top
JP15  JUMPER-SMT_2_NC_TRACE_SILK  [SMT-JUMPER_2_NC_TRACE_SILK]  64.52,37.1 180 top
JP16  [SMT-JUMPER_2_NC_TRACE_SILK]  60.71,59.96 270 top
JP17  JUMPER-SMT_3_2-NC_TRACE_SILK  [SMT-JUMPER_3_2-NC_TRACE_SILK]  43.69,65.04 270 top
JP18  JUMPER-SMT_2_NC_TRACE_SILK  [SMT-JUMPER_2_NC_TRACE_SILK]  13.21,75.2 180 top
JP19  JUMPER-SMT_2_NC_TRACE_SILK  [SMT-JUMPER_2_NC_TRACE_SILK]  13.21,65.04 180 top
JP20  [SMT-JUMPER_2_NC_TRACE_SILK]  9.4,87.9 270 top
JP21  JUMPER-SMT_3_2-NC_TRACE_SILK  [SMT-JUMPER_3_2-NC_TRACE_SILK]  95,65.04 270 top
JP22  JUMPER-SMT_2_NC_TRACE_SILK  [SMT-JUMPER_2_NC_TRACE_SILK]  64.52,75.2 180 top
JP23  JUMPER-SMT_2_NC_TRACE_SILK  [SMT-JUMPER_2_NC_TRACE_SILK]  64.52,65.04 180 top
JP24  [SMT-JUMPER_2_NC_TRACE_SILK]  60.71,87.9 270 top
JP25  JUMPER-SMT_3_2-NC_TRACE_SILK  [SMT-JUMPER_3_2-NC_TRACE_SILK]  43.69,92.99 270 top
JP26  JUMPER-SMT_2_NC_TRACE_SILK  [SMT-JUMPER_2_NC_TRACE_SILK]  13.21,103.15 180 top
JP27  JUMPER-SMT_2_NC_TRACE_SILK  [SMT-JUMPER_2_NC_TRACE_SILK]  13.21,92.99 180 top
JP28  [SMT-JUMPER_2_NC_TRACE_SILK]  9.4,115.85 270 top
JP29  JUMPER-SMT_3_2-NC_TRACE_SILK  [SMT-JUMPER_3_2-NC_TRACE_SILK]  95,92.99 270 top
JP30  JUMPER-SMT_2_NC_TRACE_SILK  [SMT-JUMPER_2_NC_TRACE_SILK]  64.52,103.15 180 top
JP31  JUMPER-SMT_2_NC_TRACE_SILK  [SMT-JUMPER_2_NC_TRACE_SILK]  64.52,92.99 180 top
JP32  [SMT-JUMPER_2_NC_TRACE_SILK]  60.71,115.85 270 top
JP33  JUMPER-SMT_3_2-NC_TRACE_SILK  [SMT-JUMPER_3_2-NC_TRACE_SILK]  43.69,120.94 270 top
JP34  JUMPER-SMT_2_NC_TRACE_SILK  [SMT-JUMPER_2_NC_TRACE_SILK]  13.21,131.1 180 top
JP35  JUMPER-SMT_2_NC_TRACE_SILK  [SMT-JUMPER_2_NC_TRACE_SILK]  13.21,120.94 180 top
JP36  [SMT-JUMPER_2_NC_TRACE_SILK]  9.4,143.8 270 top
JP37  JUMPER-SMT_3_2-NC_TRACE_SILK  [SMT-JUMPER_3_2-NC_TRACE_SILK]  95,120.94 270 top
JP38  JUMPER-SMT_2_NC_TRACE_SILK  [SMT-JUMPER_2_NC_TRACE_SILK]  64.52,131.1 180 top
JP39  JUMPER-SMT_2_NC_TRACE_SILK  [SMT-JUMPER_2_NC_TRACE_SILK]  64.52,120.94 180 top
JP40  [SMT-JUMPER_2_NC_TRACE_SILK]  60.71,143.8 270 top
LOGO1  SFE_LOGO_NAME9_MM  [SFE_LOGO_NAME_9MM]  96.39,32.77 0 top
LOGO2  SFE_LOGO_NAME_FLAME9_MM  [SFE_LOGO_NAME_FLAME_9MM]  51.82,12.71 90 bottom
LOGO3  QWIIC_LOGO_CONNECTOR  [QWIIC_5.5MM]  51.18,11.69 90 top
LOGO4  OSHW-LOGOMINI  [OSHW-LOGO-MINI]  51.31,32.01 90 bottom
LOGO5  SFE_LOGO_NAME9_MM  [SFE_LOGO_NAME_9MM]  45.08,32.77 0 top
LOGO6  SFE_LOGO_NAME_FLAME9_MM  [SFE_LOGO_NAME_FLAME_9MM]  103.12,12.71 90 bottom
LOGO7  OSHW-LOGOMINI  [OSHW-LOGO-MINI]  102.62,32.01 90 bottom
LOGO8  QWIIC_LOGO_CONNECTOR  [QWIIC_5.5MM]  102.49,11.69 90 top
LOGO9  SFE_LOGO_NAME9_MM  [SFE_LOGO_NAME_9MM]  45.08,60.72 0 top
LOGO10  SFE_LOGO_NAME_FLAME9_MM  [SFE_LOGO_NAME_FLAME_9MM]  51.82,40.65 90 bottom
LOGO11  OSHW-LOGOMINI  [OSHW-LOGO-MINI]  51.31,59.96 90 bottom
LOGO12  QWIIC_LOGO_CONNECTOR  [QWIIC_5.5MM]  51.18,39.64 90 top
LOGO13  SFE_LOGO_NAME9_MM  [SFE_LOGO_NAME_9MM]  96.39,60.72 0 top
LOGO14  SFE_LOGO_NAME_FLAME9_MM  [SFE_LOGO_NAME_FLAME_9MM]  103.12,40.65 90 bottom
LOGO15  OSHW-LOGOMINI  [OSHW-LOGO-MINI]  102.62,59.96 90 bottom
LOGO16  QWIIC_LOGO_CONNECTOR  [QWIIC_5.5MM]  102.49,39.64 90 top
LOGO17  SFE_LOGO_NAME9_MM  [SFE_LOGO_NAME_9MM]  45.08,88.67 0 top
LOGO18  SFE_LOGO_NAME_FLAME9_MM  [SFE_LOGO_NAME_FLAME_9MM]  51.82,68.6 90 bottom
LOGO19  OSHW-LOGOMINI  [OSHW-LOGO-MINI]  51.31,87.9 90 bottom
LOGO20  QWIIC_LOGO_CONNECTOR  [QWIIC_5.5MM]  51.18,67.58 90 top
LOGO21  SFE_LOGO_NAME9_MM  [SFE_LOGO_NAME_9MM]  96.39,88.67 0 top
LOGO22  SFE_LOGO_NAME_FLAME9_MM  [SFE_LOGO_NAME_FLAME_9MM]  103.12,68.6 90 bottom
LOGO23  OSHW-LOGOMINI  [OSHW-LOGO-MINI]  102.62,87.9 90 bottom
LOGO24  QWIIC_LOGO_CONNECTOR  [QWIIC_5.5MM]  102.49,67.58 90 top
LOGO25  SFE_LOGO_NAME9_MM  [SFE_LOGO_NAME_9MM]  45.08,116.61 0 top
LOGO26  SFE_LOGO_NAME_FLAME9_MM  [SFE_LOGO_NAME_FLAME_9MM]  51.82,96.55 90 bottom
LOGO27  OSHW-LOGOMINI  [OSHW-LOGO-MINI]  51.31,115.85 90 bottom
LOGO28  QWIIC_LOGO_CONNECTOR  [QWIIC_5.5MM]  51.18,95.53 90 top
LOGO29  SFE_LOGO_NAME9_MM  [SFE_LOGO_NAME_9MM]  96.39,116.61 0 top
LOGO30  SFE_LOGO_NAME_FLAME9_MM  [SFE_LOGO_NAME_FLAME_9MM]  103.12,96.55 90 bottom
LOGO31  OSHW-LOGOMINI  [OSHW-LOGO-MINI]  102.62,115.85 90 bottom
LOGO32  QWIIC_LOGO_CONNECTOR  [QWIIC_5.5MM]  102.49,95.53 90 top
LOGO33  SFE_LOGO_NAME9_MM  [SFE_LOGO_NAME_9MM]  45.08,144.56 0 top
LOGO34  SFE_LOGO_NAME_FLAME9_MM  [SFE_LOGO_NAME_FLAME_9MM]  51.82,124.5 90 bottom
LOGO35  OSHW-LOGOMINI  [OSHW-LOGO-MINI]  51.31,143.8 90 bottom
LOGO36  QWIIC_LOGO_CONNECTOR  [QWIIC_5.5MM]  51.18,123.48 90 top
LOGO37  SFE_LOGO_NAME9_MM  [SFE_LOGO_NAME_9MM]  96.39,144.56 0 top
LOGO38  SFE_LOGO_NAME_FLAME9_MM  [SFE_LOGO_NAME_FLAME_9MM]  103.12,124.5 90 bottom
LOGO39  OSHW-LOGOMINI  [OSHW-LOGO-MINI]  102.62,143.8 90 bottom
LOGO40  QWIIC_LOGO_CONNECTOR  [QWIIC_5.5MM]  102.49,123.48 90 top
Q1  20V/0.2A/8MHz/1.2Ω/1Vth  [SOT-416FL]  15.75,11.69 90 top
Q2  20V/0.2A/8MHz/1.2Ω/1Vth  [SOT-416FL]  15.75,15.5 90 top
Q3  600mA/40V  [SOT23-3]  43.69,12.96 270 top
Q4  600mA/40V  [SOT23-3]  43.69,18.04 270 top
Q5  600mA/40V  [SOT23-3]  43.69,23.12 270 top
Q6  600mA/40V  [SOT23-3]  43.69,28.2 270 top
Q7  [SOT363_PHILIPS]  22.1,20.58 270 top
Q8  20V/4.2A/52mΩ/1.4W  [SOT23-3]  17.02,20.58 90 top
Q9  20V/0.2A/8MHz/1.2Ω/1Vth  [SOT-416FL]  67.06,15.5 90 top
Q10  20V/0.2A/8MHz/1.2Ω/1Vth  [SOT-416FL]  67.06,11.69 90 top
Q11  600mA/40V  [SOT23-3]  95,12.96 270 top
Q12  600mA/40V  [SOT23-3]  95,18.04 270 top
Q13  600mA/40V  [SOT23-3]  95,23.12 270 top
Q14  600mA/40V  [SOT23-3]  95,28.2 270 top
Q15  [SOT363_PHILIPS]  73.41,20.58 270 top
Q16  20V/4.2A/52mΩ/1.4W  [SOT23-3]  68.33,20.58 90 top
Q17  20V/0.2A/8MHz/1.2Ω/1Vth  [SOT-416FL]  15.75,43.45 90 top
Q18  20V/0.2A/8MHz/1.2Ω/1Vth  [SOT-416FL]  15.75,39.64 90 top
Q19  600mA/40V  [SOT23-3]  43.69,40.91 270 top
Q20  600mA/40V  [SOT23-3]  43.69,45.99 270 top
Q21  600mA/40V  [SOT23-3]  43.69,51.07 270 top
Q22  600mA/40V  [SOT23-3]  43.69,56.15 270 top
Q23  [SOT363_PHILIPS]  22.1,48.53 270 top
Q24  20V/4.2A/52mΩ/1.4W  [SOT23-3]  17.02,48.53 90 top
Q25  20V/0.2A/8MHz/1.2Ω/1Vth  [SOT-416FL]  67.06,43.45 90 top
Q26  20V/0.2A/8MHz/1.2Ω/1Vth  [SOT-416FL]  67.06,39.64 90 top
Q27  600mA/40V  [SOT23-3]  95,40.91 270 top
Q28  600mA/40V  [SOT23-3]  95,45.99 270 top
Q29  600mA/40V  [SOT23-3]  95,51.07 270 top
Q30  600mA/40V  [SOT23-3]  95,56.15 270 top
Q31  [SOT363_PHILIPS]  73.41,48.53 270 top
Q32  20V/4.2A/52mΩ/1.4W  [SOT23-3]  68.33,48.53 90 top
Q33  20V/0.2A/8MHz/1.2Ω/1Vth  [SOT-416FL]  15.75,71.39 90 top
Q34  20V/0.2A/8MHz/1.2Ω/1Vth  [SOT-416FL]  15.75,67.58 90 top
Q35  600mA/40V  [SOT23-3]  43.69,68.85 270 top
Q36  600mA/40V  [SOT23-3]  43.69,73.93 270 top
Q37  600mA/40V  [SOT23-3]  43.69,79.01 270 top
Q38  600mA/40V  [SOT23-3]  43.69,84.09 270 top
Q39  [SOT363_PHILIPS]  22.1,76.47 270 top
Q40  20V/4.2A/52mΩ/1.4W  [SOT23-3]  17.02,76.47 90 top
Q41  20V/0.2A/8MHz/1.2Ω/1Vth  [SOT-416FL]  67.06,71.39 90 top
Q42  20V/0.2A/8MHz/1.2Ω/1Vth  [SOT-416FL]  67.06,67.58 90 top
Q43  600mA/40V  [SOT23-3]  95,68.85 270 top
Q44  600mA/40V  [SOT23-3]  95,73.93 270 top
Q45  600mA/40V  [SOT23-3]  95,79.01 270 top
Q46  600mA/40V  [SOT23-3]  95,84.09 270 top
Q47  [SOT363_PHILIPS]  73.41,76.47 270 top
Q48  20V/4.2A/52mΩ/1.4W  [SOT23-3]  68.33,76.47 90 top
Q49  20V/0.2A/8MHz/1.2Ω/1Vth  [SOT-416FL]  15.75,99.34 90 top
Q50  20V/0.2A/8MHz/1.2Ω/1Vth  [SOT-416FL]  15.75,95.53 90 top
Q51  600mA/40V  [SOT23-3]  43.69,96.8 270 top
Q52  600mA/40V  [SOT23-3]  43.69,101.88 270 top
Q53  600mA/40V  [SOT23-3]  43.69,106.96 270 top
Q54  600mA/40V  [SOT23-3]  43.69,112.04 270 top
Q55  [SOT363_PHILIPS]  22.1,104.42 270 top
Q56  20V/4.2A/52mΩ/1.4W  [SOT23-3]  17.02,104.42 90 top
Q57  20V/0.2A/8MHz/1.2Ω/1Vth  [SOT-416FL]  67.06,99.34 90 top
Q58  20V/0.2A/8MHz/1.2Ω/1Vth  [SOT-416FL]  67.06,95.53 90 top
Q59  600mA/40V  [SOT23-3]  95,96.8 270 top
Q60  600mA/40V  [SOT23-3]  95,101.88 270 top
Q61  600mA/40V  [SOT23-3]  95,106.96 270 top
Q62  600mA/40V  [SOT23-3]  95,112.04 270 top
Q63  [SOT363_PHILIPS]  73.41,104.42 270 top
Q64  20V/4.2A/52mΩ/1.4W  [SOT23-3]  68.33,104.42 90 top
Q65  20V/0.2A/8MHz/1.2Ω/1Vth  [SOT-416FL]  15.75,127.29 90 top
Q66  20V/0.2A/8MHz/1.2Ω/1Vth  [SOT-416FL]  15.75,123.48 90 top
Q67  600mA/40V  [SOT23-3]  43.69,124.75 270 top
Q68  600mA/40V  [SOT23-3]  43.69,129.83 270 top
Q69  600mA/40V  [SOT23-3]  43.69,134.91 270 top
Q70  600mA/40V  [SOT23-3]  43.69,139.99 270 top
Q71  [SOT363_PHILIPS]  22.1,132.37 270 top
Q72  20V/4.2A/52mΩ/1.4W  [SOT23-3]  17.02,132.37 90 top
Q73  20V/0.2A/8MHz/1.2Ω/1Vth  [SOT-416FL]  67.06,127.29 90 top
Q74  20V/0.2A/8MHz/1.2Ω/1Vth  [SOT-416FL]  67.06,123.48 90 top
Q75  600mA/40V  [SOT23-3]  95,124.75 270 top
Q76  600mA/40V  [SOT23-3]  95,129.83 270 top
Q77  600mA/40V  [SOT23-3]  95,134.91 270 top
Q78  600mA/40V  [SOT23-3]  95,139.99 270 top
Q79  [SOT363_PHILIPS]  73.41,132.37 270 top
Q80  20V/4.2A/52mΩ/1.4W  [SOT23-3]  68.33,132.37 90 top
R1  1k  [0603]  34.8,8.51 180 top
R2  10k  [0603]  39.88,26.93 0 top
R3  2.2k  [0603]  47.5,10.42 180 top
R4  10k  [0603]  39.88,29.47 180 top
R5  0  [0603]  19.56,18.04 180 top
R6  2.2k  [0603]  47.5,7.88 180 top
R7  5.1k  [0603]  17.02,23.12 180 top
R8  5.1k  [0603]  17.02,28.2 180 top
R9  220  [0603]  47.5,16.77 0 top
R10  10k  [0603]  20.83,11.69 90 top
R11  2.2k  [0603]  18.29,15.5 270 top
R12  330  [0603]  19.56,9.15 180 top
R13  2.2k  [0603]  14.48,15.5 90 top
R14  2.2k  [0603]  18.29,11.69 270 top
R15  2.2k  [0603]  14.48,11.69 270 top
R16  100k  [0603]  20.83,15.5 270 top
R17  100k  [0603]  28.45,28.2 270 top
R18  100k  [0603]  36.07,28.2 90 top
R19  100k  [0603]  30.99,28.2 90 top
R20  220  [0603]  47.5,12.32 0 top
R21  220  [0603]  47.5,20.58 0 top
R22  220  [0603]  47.5,25.02 0 top
R23  1k  [0603]  43.69,15.5 180 top
R24  1k  [0603]  43.69,20.58 180 top
R25  1k  [0603]  43.69,25.66 180 top
R26  1k  [0603]  43.69,30.74 180 top
R27  100k  [0603]  24.64,20.58 90 top
R28  1M  [0603]  19.56,20.58 270 top
R29  100k  [0603]  72.14,15.5 270 top
R30  100k  [0603]  79.76,28.2 270 top
R31  100k  [0603]  87.38,28.2 90 top
R32  100k  [0603]  82.3,28.2 90 top
R33  10k  [0603]  91.19,26.93 0 top
R34  10k  [0603]  91.19,29.47 180 top
R35  330  [0603]  70.87,9.15 180 top
R36  0  [0603]  70.87,18.04 180 top
R37  5.1k  [0603]  68.33,23.12 180 top
R38  5.1k  [0603]  68.33,28.2 180 top
R39  1k  [0603]  86.11,8.51 180 top
R40  220  [0603]  98.81,16.77 0 top
R41  10k  [0603]  72.14,11.69 90 top
R42  2.2k  [0603]  98.81,10.42 180 top
R43  2.2k  [0603]  98.81,7.88 180 top
R44  2.2k  [0603]  69.6,15.5 270 top
R45  2.2k  [0603]  65.79,15.5 90 top
R46  2.2k  [0603]  69.6,11.69 270 top
R47  2.2k  [0603]  65.79,11.69 270 top
R48  220  [0603]  98.81,12.32 0 top
R49  220  [0603]  98.81,20.58 0 top
R50  220  [0603]  98.81,25.02 0 top
R51  1k  [0603]  95,15.5 180 top
R52  1k  [0603]  95,20.58 180 top
R53  1k  [0603]  95,25.66 180 top
R54  1k  [0603]  95,30.74 180 top
R55  100k  [0603]  75.95,20.58 90 top
R56  1M  [0603]  70.87,20.58 270 top
R57  100k  [0603]  20.83,43.45 270 top
R58  100k  [0603]  28.45,56.15 270 top
R59  100k  [0603]  36.07,56.15 90 top
R60  100k  [0603]  30.99,56.15 90 top
R61  10k  [0603]  39.88,54.88 0 top
R62  10k  [0603]  39.88,57.42 180 top
R63  330  [0603]  19.56,37.1 180 top
R64  0  [0603]  19.56,45.99 180 top
R65  5.1k  [0603]  17.02,51.07 180 top
R66  5.1k  [0603]  17.02,56.15 180 top
R67  1k  [0603]  34.8,36.46 180 top
R68  220  [0603]  47.5,44.72 0 top
R69  10k  [0603]  20.83,39.64 90 top
R70  2.2k  [0603]  47.5,38.37 180 top
R71  2.2k  [0603]  47.5,35.83 180 top
R72  2.2k  [0603]  18.29,43.45 270 top
R73  2.2k  [0603]  14.48,43.45 90 top
R74  2.2k  [0603]  18.29,39.64 270 top
R75  2.2k  [0603]  14.48,39.64 270 top
R76  220  [0603]  47.5,40.27 0 top
R77  220  [0603]  47.5,48.53 0 top
R78  220  [0603]  47.5,52.97 0 top
R79  1k  [0603]  43.69,43.45 180 top
R80  1k  [0603]  43.69,48.53 180 top
R81  1k  [0603]  43.69,53.61 180 top
R82  1k  [0603]  43.69,58.69 180 top
R83  100k  [0603]  24.64,48.53 90 top
R84  1M  [0603]  19.56,48.53 270 top
R85  100k  [0603]  72.14,43.45 270 top
R86  100k  [0603]  79.76,56.15 270 top
R87  100k  [0603]  87.38,56.15 90 top
R88  100k  [0603]  82.3,56.15 90 top
R89  10k  [0603]  91.19,54.88 0 top
R90  10k  [0603]  91.19,57.42 180 top
R91  330  [0603]  70.87,37.1 180 top
R92  0  [0603]  70.87,45.99 180 top
R93  5.1k  [0603]  68.33,51.07 180 top
R94  5.1k  [0603]  68.33,56.15 180 top
R95  1k  [0603]  86.11,36.46 180 top
R96  220  [0603]  98.81,44.72 0 top
R97  10k  [0603]  72.14,39.64 90 top
R98  2.2k  [0603]  98.81,38.37 180 top
R99  2.2k  [0603]  98.81,35.83 180 top
R100  2.2k  [0603]  69.6,43.45 270 top
R101  2.2k  [0603]  65.79,43.45 90 top
R102  2.2k  [0603]  69.6,39.64 270 top
R103  2.2k  [0603]  65.79,39.64 270 top
R104  220  [0603]  98.81,40.27 0 top
R105  220  [0603]  98.81,48.53 0 top
R106  220  [0603]  98.81,52.97 0 top
R107  1k  [0603]  95,43.45 180 top
R108  1k  [0603]  95,48.53 180 top
R109  1k  [0603]  95,53.61 180 top
R110  1k  [0603]  95,58.69 180 top
R111  100k  [0603]  75.95,48.53 90 top
R112  1M  [0603]  70.87,48.53 270 top
R113  100k  [0603]  20.83,71.39 270 top
R114  100k  [0603]  28.45,84.09 270 top
R115  100k  [0603]  36.07,84.09 90 top
R116  100k  [0603]  30.99,84.09 90 top
R117  10k  [0603]  39.88,82.82 0 top
R118  10k  [0603]  39.88,85.36 180 top
R119  330  [0603]  19.56,65.04 180 top
R120  0  [0603]  19.56,73.93 180 top
R121  5.1k  [0603]  17.02,79.01 180 top
R122  5.1k  [0603]  17.02,84.09 180 top
R123  1k  [0603]  34.8,64.41 180 top
R124  220  [0603]  47.5,72.66 0 top
R125  10k  [0603]  20.83,67.58 90 top
R126  2.2k  [0603]  47.5,66.31 180 top
R127  2.2k  [0603]  47.5,63.77 180 top
R128  2.2k  [0603]  18.29,71.39 270 top
R129  2.2k  [0603]  14.48,71.39 90 top
R130  2.2k  [0603]  18.29,67.58 270 top
R131  2.2k  [0603]  14.48,67.58 270 top
R132  220  [0603]  47.5,68.22 0 top
R133  220  [0603]  47.5,76.47 0 top
R134  220  [0603]  47.5,80.92 0 top
R135  1k  [0603]  43.69,71.39 180 top
R136  1k  [0603]  43.69,76.47 180 top
R137  1k  [0603]  43.69,81.55 180 top
R138  1k  [0603]  43.69,86.63 180 top
R139  100k  [0603]  24.64,76.47 90 top
R140  1M  [0603]  19.56,76.47 270 top
R141  100k  [0603]  72.14,71.39 270 top
R142  100k  [0603]  79.76,84.09 270 top
R143  100k  [0603]  87.38,84.09 90 top
R144  100k  [0603]  82.3,84.09 90 top
R145  10k  [0603]  91.19,82.82 0 top
R146  10k  [0603]  91.19,85.36 180 top
R147  330  [0603]  70.87,65.04 180 top
R148  0  [0603]  70.87,73.93 180 top
R149  5.1k  [0603]  68.33,79.01 180 top
R150  5.1k  [0603]  68.33,84.09 180 top
R151  1k  [0603]  86.11,64.41 180 top
R152  220  [0603]  98.81,72.66 0 top
R153  10k  [0603]  72.14,67.58 90 top
R154  2.2k  [0603]  98.81,66.31 180 top
R155  2.2k  [0603]  98.81,63.77 180 top
R156  2.2k  [0603]  69.6,71.39 270 top
R157  2.2k  [0603]  65.79,71.39 90 top
R158  2.2k  [0603]  69.6,67.58 270 top
R159  2.2k  [0603]  65.79,67.58 270 top
R160  220  [0603]  98.81,68.22 0 top
R161  220  [0603]  98.81,76.47 0 top
R162  220  [0603]  98.81,80.92 0 top
R163  1k  [0603]  95,71.39 180 top
R164  1k  [0603]  95,76.47 180 top
R165  1k  [0603]  95,81.55 180 top
R166  1k  [0603]  95,86.63 180 top
R167  100k  [0603]  75.95,76.47 90 top
R168  1M  [0603]  70.87,76.47 270 top
R169  100k  [0603]  20.83,99.34 270 top
R170  100k  [0603]  28.45,112.04 270 top
R171  100k  [0603]  36.07,112.04 90 top
R172  100k  [0603]  30.99,112.04 90 top
R173  10k  [0603]  39.88,110.77 0 top
R174  10k  [0603]  39.88,113.31 180 top
R175  330  [0603]  19.56,92.99 180 top
R176  0  [0603]  19.56,101.88 180 top
R177  5.1k  [0603]  17.02,106.96 180 top
R178  5.1k  [0603]  17.02,112.04 180 top
R179  1k  [0603]  34.8,92.36 180 top
R180  220  [0603]  47.5,100.61 0 top
R181  10k  [0603]  20.83,95.53 90 top
R182  2.2k  [0603]  47.5,94.26 180 top
R183  2.2k  [0603]  47.5,91.72 180 top
R184  2.2k  [0603]  18.29,99.34 270 top
R185  2.2k  [0603]  14.48,99.34 90 top
R186  2.2k  [0603]  18.29,95.53 270 top
R187  2.2k  [0603]  14.48,95.53 270 top
R188  220  [0603]  47.5,96.17 0 top
R189  220  [0603]  47.5,104.42 0 top
R190  220  [0603]  47.5,108.87 0 top
R191  1k  [0603]  43.69,99.34 180 top
R192  1k  [0603]  43.69,104.42 180 top
R193  1k  [0603]  43.69,109.5 180 top
R194  1k  [0603]  43.69,114.58 180 top
R195  100k  [0603]  24.64,104.42 90 top
R196  1M  [0603]  19.56,104.42 270 top
R197  100k  [0603]  72.14,99.34 270 top
R198  100k  [0603]  79.76,112.04 270 top
R199  100k  [0603]  87.38,112.04 90 top
R200  100k  [0603]  82.3,112.04 90 top
R201  10k  [0603]  91.19,110.77 0 top
R202  10k  [0603]  91.19,113.31 180 top
R203  330  [0603]  70.87,92.99 180 top
R204  0  [0603]  70.87,101.88 180 top
R205  5.1k  [0603]  68.33,106.96 180 top
R206  5.1k  [0603]  68.33,112.04 180 top
R207  1k  [0603]  86.11,92.36 180 top
R208  220  [0603]  98.81,100.61 0 top
R209  10k  [0603]  72.14,95.53 90 top
R210  2.2k  [0603]  98.81,94.26 180 top
R211  2.2k  [0603]  98.81,91.72 180 top
R212  2.2k  [0603]  69.6,99.34 270 top
R213  2.2k  [0603]  65.79,99.34 90 top
R214  2.2k  [0603]  69.6,95.53 270 top
R215  2.2k  [0603]  65.79,95.53 270 top
R216  220  [0603]  98.81,96.17 0 top
R217  220  [0603]  98.81,104.42 0 top
R218  220  [0603]  98.81,108.87 0 top
R219  1k  [0603]  95,99.34 180 top
R220  1k  [0603]  95,104.42 180 top
R221  1k  [0603]  95,109.5 180 top
R222  1k  [0603]  95,114.58 180 top
R223  100k  [0603]  75.95,104.42 90 top
R224  1M  [0603]  70.87,104.42 270 top
R225  100k  [0603]  20.83,127.29 270 top
R226  100k  [0603]  28.45,139.99 270 top
R227  100k  [0603]  36.07,139.99 90 top
R228  100k  [0603]  30.99,139.99 90 top
R229  10k  [0603]  39.88,138.72 0 top
R230  10k  [0603]  39.88,141.26 180 top
R231  330  [0603]  19.56,120.94 180 top
R232  0  [0603]  19.56,129.83 180 top
R233  5.1k  [0603]  17.02,134.91 180 top
R234  5.1k  [0603]  17.02,139.99 180 top
R235  1k  [0603]  34.8,120.31 180 top
R236  220  [0603]  47.5,128.56 0 top
R237  10k  [0603]  20.83,123.48 90 top
R238  2.2k  [0603]  47.5,122.21 180 top
R239  2.2k  [0603]  47.5,119.67 180 top
R240  2.2k  [0603]  18.29,127.29 270 top
R241  2.2k  [0603]  14.48,127.29 90 top
R242  2.2k  [0603]  18.29,123.48 270 top
R243  2.2k  [0603]  14.48,123.48 270 top
R244  220  [0603]  47.5,124.12 0 top
R245  220  [0603]  47.5,132.37 0 top
R246  220  [0603]  47.5,136.82 0 top
R247  1k  [0603]  43.69,127.29 180 top
R248  1k  [0603]  43.69,132.37 180 top
R249  1k  [0603]  43.69,137.45 180 top
R250  1k  [0603]  43.69,142.53 180 top
R251  100k  [0603]  24.64,132.37 90 top
R252  1M  [0603]  19.56,132.37 270 top
R253  100k  [0603]  72.14,127.29 270 top
R254  100k  [0603]  79.76,139.99 270 top
R255  100k  [0603]  87.38,139.99 90 top
R256  100k  [0603]  82.3,139.99 90 top
R257  10k  [0603]  91.19,138.72 0 top
R258  10k  [0603]  91.19,141.26 180 top
R259  330  [0603]  70.87,120.94 180 top
R260  0  [0603]  70.87,129.83 180 top
R261  5.1k  [0603]  68.33,134.91 180 top
R262  5.1k  [0603]  68.33,139.99 180 top
R263  1k  [0603]  86.11,120.31 180 top
R264  220  [0603]  98.81,128.56 0 top
R265  10k  [0603]  72.14,123.48 90 top
R266  2.2k  [0603]  98.81,122.21 180 top
R267  2.2k  [0603]  98.81,119.67 180 top
R268  2.2k  [0603]  69.6,127.29 270 top
R269  2.2k  [0603]  65.79,127.29 90 top
R270  2.2k  [0603]  69.6,123.48 270 top
R271  2.2k  [0603]  65.79,123.48 270 top
R272  220  [0603]  98.81,124.12 0 top
R273  220  [0603]  98.81,132.37 0 top
R274  220  [0603]  98.81,136.82 0 top
R275  1k  [0603]  95,127.29 180 top
R276  1k  [0603]  95,132.37 180 top
R277  1k  [0603]  95,137.45 180 top
R278  1k  [0603]  95,142.53 180 top
R279  100k  [0603]  75.95,132.37 90 top
R280  1M  [0603]  70.87,132.37 270 top
S1  Train  [TACTILE_SWITCH_SMD_RIGHT_ANGLE]  55.12,19.31 90 top
S2  Reset  [TACTILE_SWITCH_SMD_5.2MM]  77.22,11.69 90 top
S3  Reset  [TACTILE_SWITCH_SMD_5.2MM]  25.91,11.69 90 top
S4  Train  [TACTILE_SWITCH_SMD_RIGHT_ANGLE]  106.43,19.31 90 top
S5  Reset  [TACTILE_SWITCH_SMD_5.2MM]  25.91,39.64 90 top
S6  Train  [TACTILE_SWITCH_SMD_RIGHT_ANGLE]  55.12,47.26 90 top
S7  Reset  [TACTILE_SWITCH_SMD_5.2MM]  77.22,39.64 90 top
S8  Train  [TACTILE_SWITCH_SMD_RIGHT_ANGLE]  106.43,47.26 90 top
S9  Reset  [TACTILE_SWITCH_SMD_5.2MM]  25.91,67.58 90 top
S10  Train  [TACTILE_SWITCH_SMD_RIGHT_ANGLE]  55.12,75.2 90 top
S11  Reset  [TACTILE_SWITCH_SMD_5.2MM]  77.22,67.58 90 top
S12  Train  [TACTILE_SWITCH_SMD_RIGHT_ANGLE]  106.43,75.2 90 top
S13  Reset  [TACTILE_SWITCH_SMD_5.2MM]  25.91,95.53 90 top
S14  Train  [TACTILE_SWITCH_SMD_RIGHT_ANGLE]  55.12,103.15 90 top
S15  Reset  [TACTILE_SWITCH_SMD_5.2MM]  77.22,95.53 90 top
S16  Train  [TACTILE_SWITCH_SMD_RIGHT_ANGLE]  106.43,103.15 90 top
S17  Reset  [TACTILE_SWITCH_SMD_5.2MM]  25.91,123.48 90 top
S18  Train  [TACTILE_SWITCH_SMD_RIGHT_ANGLE]  55.12,131.1 90 top
S19  Reset  [TACTILE_SWITCH_SMD_5.2MM]  77.22,123.48 90 top
S20  Train  [TACTILE_SWITCH_SMD_RIGHT_ANGLE]  106.43,131.1 90 top
TP1  [PAD.03X.05]  55.12,7.88 0 bottom
TP2  [PAD.03X.05]  8.89,23.12 0 bottom
TP3  [PAD.03X.05]  55.12,18.04 0 bottom
TP4  [PAD.03X.05]  55.12,15.5 0 bottom
TP5  [PAD.03X.05]  8.13,9.15 0 bottom
TP6  [PAD.03X.05]  8.13,14.23 0 bottom
TP7  [PAD.03X.05]  8.13,19.31 0 bottom
TP8  [PAD.03X.05]  8.13,16.77 0 bottom
TP9  [PAD.03X.05]  8.13,11.69 0 bottom
TP10  [PAD.03X.05]  56.39,10.42 0 bottom
TP11  [PAD.03X.05]  56.39,12.96 0 bottom
TP12  [PAD.03X.05]  51.31,21.85 0 bottom
TP13  [PAD.03X.05]  51.31,19.31 0 bottom
TP14  [PAD.03X.05]  106.43,7.88 0 bottom
TP15  [PAD.03X.05]  60.2,23.12 0 bottom
TP16  [PAD.03X.05]  106.43,18.04 0 bottom
TP17  [PAD.03X.05]  106.43,15.5 0 bottom
TP18  [PAD.03X.05]  59.44,9.15 0 bottom
TP19  [PAD.03X.05]  59.44,14.23 0 bottom
TP20  [PAD.03X.05]  59.44,19.31 0 bottom
TP21  [PAD.03X.05]  59.44,16.77 0 bottom
TP22  [PAD.03X.05]  59.44,11.69 0 bottom
TP23  [PAD.03X.05]  107.7,10.42 0 bottom
TP24  [PAD.03X.05]  107.7,12.96 0 bottom
TP25  [PAD.03X.05]  102.62,21.85 0 bottom
TP26  [PAD.03X.05]  102.62,19.31 0 bottom
TP27  [PAD.03X.05]  55.12,35.83 0 bottom
TP28  [PAD.03X.05]  8.89,51.07 0 bottom
TP29  [PAD.03X.05]  55.12,45.99 0 bottom
TP30  [PAD.03X.05]  55.12,43.45 0 bottom
TP31  [PAD.03X.05]  8.13,37.1 0 bottom
TP32  [PAD.03X.05]  8.13,42.18 0 bottom
TP33  [PAD.03X.05]  8.13,47.26 0 bottom
TP34  [PAD.03X.05]  8.13,44.72 0 bottom
TP35  [PAD.03X.05]  8.13,39.64 0 bottom
TP36  [PAD.03X.05]  56.39,38.37 0 bottom
TP37  [PAD.03X.05]  56.39,40.91 0 bottom
TP38  [PAD.03X.05]  51.31,49.8 0 bottom
TP39  [PAD.03X.05]  51.31,47.26 0 bottom
TP40  [PAD.03X.05]  106.43,35.83 0 bottom
TP41  [PAD.03X.05]  60.2,51.07 0 bottom
TP42  [PAD.03X.05]  106.43,45.99 0 bottom
TP43  [PAD.03X.05]  106.43,43.45 0 bottom
TP44  [PAD.03X.05]  59.44,37.1 0 bottom
TP45  [PAD.03X.05]  59.44,42.18 0 bottom
TP46  [PAD.03X.05]  59.44,47.26 0 bottom
TP47  [PAD.03X.05]  59.44,44.72 0 bottom
TP48  [PAD.03X.05]  59.44,39.64 0 bottom
TP49  [PAD.03X.05]  107.7,38.37 0 bottom
TP50  [PAD.03X.05]  107.7,40.91 0 bottom
TP51  [PAD.03X.05]  102.62,49.8 0 bottom
TP52  [PAD.03X.05]  102.62,47.26 0 bottom
TP53  [PAD.03X.05]  55.12,63.77 0 bottom
TP54  [PAD.03X.05]  8.89,79.01 0 bottom
TP55  [PAD.03X.05]  55.12,73.93 0 bottom
TP56  [PAD.03X.05]  55.12,71.39 0 bottom
TP57  [PAD.03X.05]  8.13,65.04 0 bottom
TP58  [PAD.03X.05]  8.13,70.12 0 bottom
TP59  [PAD.03X.05]  8.13,75.2 0 bottom
TP60  [PAD.03X.05]  8.13,72.66 0 bottom
TP61  [PAD.03X.05]  8.13,67.58 0 bottom
TP62  [PAD.03X.05]  56.39,66.31 0 bottom
TP63  [PAD.03X.05]  56.39,68.85 0 bottom
TP64  [PAD.03X.05]  51.31,77.74 0 bottom
TP65  [PAD.03X.05]  51.31,75.2 0 bottom
TP66  [PAD.03X.05]  106.43,63.77 0 bottom
TP67  [PAD.03X.05]  60.2,79.01 0 bottom
TP68  [PAD.03X.05]  106.43,73.93 0 bottom
TP69  [PAD.03X.05]  106.43,71.39 0 bottom
TP70  [PAD.03X.05]  59.44,65.04 0 bottom
TP71  [PAD.03X.05]  59.44,70.12 0 bottom
TP72  [PAD.03X.05]  59.44,75.2 0 bottom
TP73  [PAD.03X.05]  59.44,72.66 0 bottom
TP74  [PAD.03X.05]  59.44,67.58 0 bottom
TP75  [PAD.03X.05]  107.7,66.31 0 bottom
TP76  [PAD.03X.05]  107.7,68.85 0 bottom
TP77  [PAD.03X.05]  102.62,77.74 0 bottom
TP78  [PAD.03X.05]  102.62,75.2 0 bottom
TP79  [PAD.03X.05]  55.12,91.72 0 bottom
TP80  [PAD.03X.05]  8.89,106.96 0 bottom
TP81  [PAD.03X.05]  55.12,101.88 0 bottom
TP82  [PAD.03X.05]  55.12,99.34 0 bottom
TP83  [PAD.03X.05]  8.13,92.99 0 bottom
TP84  [PAD.03X.05]  8.13,98.07 0 bottom
TP85  [PAD.03X.05]  8.13,103.15 0 bottom
TP86  [PAD.03X.05]  8.13,100.61 0 bottom
TP87  [PAD.03X.05]  8.13,95.53 0 bottom
TP88  [PAD.03X.05]  56.39,94.26 0 bottom
TP89  [PAD.03X.05]  56.39,96.8 0 bottom
TP90  [PAD.03X.05]  51.31,105.69 0 bottom
TP91  [PAD.03X.05]  51.31,103.15 0 bottom
TP92  [PAD.03X.05]  106.43,91.72 0 bottom
TP93  [PAD.03X.05]  60.2,106.96 0 bottom
TP94  [PAD.03X.05]  106.43,101.88 0 bottom
TP95  [PAD.03X.05]  106.43,99.34 0 bottom
TP96  [PAD.03X.05]  59.44,92.99 0 bottom
TP97  [PAD.03X.05]  59.44,98.07 0 bottom
TP98  [PAD.03X.05]  59.44,103.15 0 bottom
TP99  [PAD.03X.05]  59.44,100.61 0 bottom
TP100  [PAD.03X.05]  59.44,95.53 0 bottom
TP101  [PAD.03X.05]  107.7,94.26 0 bottom
TP102  [PAD.03X.05]  107.7,96.8 0 bottom
TP103  [PAD.03X.05]  102.62,105.69 0 bottom
TP104  [PAD.03X.05]  102.62,103.15 0 bottom
TP105  [PAD.03X.05]  55.12,119.67 0 bottom
TP106  [PAD.03X.05]  8.89,134.91 0 bottom
TP107  [PAD.03X.05]  55.12,129.83 0 bottom
TP108  [PAD.03X.05]  55.12,127.29 0 bottom
TP109  [PAD.03X.05]  8.13,120.94 0 bottom
TP110  [PAD.03X.05]  8.13,126.02 0 bottom
TP111  [PAD.03X.05]  8.13,131.1 0 bottom
TP112  [PAD.03X.05]  8.13,128.56 0 bottom
TP113  [PAD.03X.05]  8.13,123.48 0 bottom
TP114  [PAD.03X.05]  56.39,122.21 0 bottom
TP115  [PAD.03X.05]  56.39,124.75 0 bottom
TP116  [PAD.03X.05]  51.31,133.64 0 bottom
TP117  [PAD.03X.05]  51.31,131.1 0 bottom
TP118  [PAD.03X.05]  106.43,119.67 0 bottom
TP119  [PAD.03X.05]  60.2,134.91 0 bottom
TP120  [PAD.03X.05]  106.43,129.83 0 bottom
TP121  [PAD.03X.05]  106.43,127.29 0 bottom
TP122  [PAD.03X.05]  59.44,120.94 0 bottom
TP123  [PAD.03X.05]  59.44,126.02 0 bottom
TP124  [PAD.03X.05]  59.44,131.1 0 bottom
TP125  [PAD.03X.05]  59.44,128.56 0 bottom
TP126  [PAD.03X.05]  59.44,123.48 0 bottom
TP127  [PAD.03X.05]  107.7,122.21 0 bottom
TP128  [PAD.03X.05]  107.7,124.75 0 bottom
TP129  [PAD.03X.05]  102.62,133.64 0 bottom
TP130  [PAD.03X.05]  102.62,131.1 0 bottom
U1  3.3V/150mA  [SOT23-5]  75.95,28.2 180 top
U2  ATSAMD21G-A  [TQFP-48]  32.26,20.58 180 top
U3  3.3V/150mA  [SOT23-5]  24.64,28.2 180 top
U4  E19-915M30S  [E19-915M30S]  29.72,20.58 270 bottom
U5  E19-915M30S  [E19-915M30S]  81.03,20.58 270 bottom
U6  ATSAMD21G-A  [TQFP-48]  83.57,20.58 180 top
U7  3.3V/150mA  [SOT23-5]  24.64,56.15 180 top
U8  E19-915M30S  [E19-915M30S]  29.72,48.53 270 bottom
U9  ATSAMD21G-A  [TQFP-48]  32.26,48.53 180 top
U10  3.3V/150mA  [SOT23-5]  75.95,56.15 180 top
U11  E19-915M30S  [E19-915M30S]  81.03,48.53 270 bottom
U12  ATSAMD21G-A  [TQFP-48]  83.57,48.53 180 top
U13  3.3V/150mA  [SOT23-5]  24.64,84.09 180 top
U14  E19-915M30S  [E19-915M30S]  29.72,76.47 270 bottom
U15  ATSAMD21G-A  [TQFP-48]  32.26,76.47 180 top
U16  3.3V/150mA  [SOT23-5]  75.95,84.09 180 top
U17  E19-915M30S  [E19-915M30S]  81.03,76.47 270 bottom
U18  ATSAMD21G-A  [TQFP-48]  83.57,76.47 180 top
U19  3.3V/150mA  [SOT23-5]  24.64,112.04 180 top
U20  E19-915M30S  [E19-915M30S]  29.72,104.42 270 bottom
U21  ATSAMD21G-A  [TQFP-48]  32.26,104.42 180 top
U22  3.3V/150mA  [SOT23-5]  75.95,112.04 180 top
U23  E19-915M30S  [E19-915M30S]  81.03,104.42 270 bottom
U24  ATSAMD21G-A  [TQFP-48]  83.57,104.42 180 top
U25  3.3V/150mA  [SOT23-5]  24.64,139.99 180 top
U26  E19-915M30S  [E19-915M30S]  29.72,132.37 270 bottom
U27  ATSAMD21G-A  [TQFP-48]  32.26,132.37 180 top
U28  3.3V/150mA  [SOT23-5]  75.95,139.99 180 top
U29  E19-915M30S  [E19-915M30S]  81.03,132.37 270 bottom
U30  ATSAMD21G-A  [TQFP-48]  83.57,132.37 180 top
U$1  [1W1]  33.53,32.01 0 top
U$2  [RESET0]  25.91,7.63 0 top
U$3  [915MHZ0]  52.96,28.07 0 top
U$4  [TRAIN0]  52.58,19.31 90 top
U$5  [RADIO2]  37.46,32.01 0 top
U$6  [01]  37.46,8.64 0 top
U$7  [PWR0]  30.99,9.66 0 top
U$8  [RESET0]  77.22,7.63 0 top
U$9  [ANTENNA1]  52.7,26.93 0 top
U$10  [RX1]  15.75,7.88 0 top
U$11  [TX0]  15.75,16.77 0 top
U$12  [#0]  13.08,17.4 0 top
U$13  [#1]  13.08,11.18 90 top
U$14  [R3]  13.08,12.45 90 top
U$15  [T2]  13.08,14.86 90 top
U$16  [C0]  13.08,13.59 90 top
U$17  [R1]  13.08,16.13 90 top
U$18  [LORASERIAL0]  36.07,33.28 0 top
U$19  [C50]  11.16,7.61 0 top
U$20  [R50]  11.06,20.41 0 top
U$21  [RSSI0]  50.04,20.96 90 top
U$22  [10]  39.88,8.51 0 top
U$23  [SH0]  9.52,33.79 0 top
U$24  [915MHZ0]  104.27,28.07 0 top
U$25  [ANTENNA1]  104.01,26.93 0 top
U$26  [RADIO2]  88.77,32.01 0 top
U$27  [RX1]  67.06,7.88 0 top
U$28  [TX0]  67.06,16.77 0 top
U$29  [#0]  64.39,17.4 0 top
U$30  [#1]  64.39,11.18 90 top
U$31  [R3]  64.39,12.45 90 top
U$32  [T2]  64.39,14.86 90 top
U$33  [C0]  64.39,13.59 90 top
U$34  [R1]  64.39,16.13 90 top
U$35  [LORASERIAL0]  87.38,33.28 0 top
U$36  [1W1]  84.84,32.01 0 top
U$37  [TRAIN0]  103.89,19.31 90 top
U$38  [C50]  62.47,7.61 0 top
U$39  [R50]  62.37,20.41 0 top
U$40  [RSSI0]  101.35,20.96 90 top
U$41  [PWR0]  82.3,9.66 0 top
U$42  [01]  88.77,8.64 0 top
U$43  [10]  91.19,8.51 0 top
U$44  [SH0]  60.83,33.79 0 top
U$45  [RESET0]  25.91,35.57 0 top
U$46  [915MHZ0]  52.96,56.02 0 top
U$47  [ANTENNA1]  52.7,54.88 0 top
U$48  [RADIO2]  37.46,59.96 0 top
U$49  [RX1]  15.75,35.83 0 top
U$50  [TX0]  15.75,44.72 0 top
U$51  [#0]  13.08,45.35 0 top
U$52  [#1]  13.08,39.13 90 top
U$53  [R3]  13.08,40.4 90 top
U$54  [T2]  13.08,42.81 90 top
U$55  [C0]  13.08,41.54 90 top
U$56  [R1]  13.08,44.08 90 top
U$57  [LORASERIAL0]  36.07,61.23 0 top
U$58  [1W1]  33.53,59.96 0 top
U$59  [TRAIN0]  52.58,47.26 90 top
U$60  [C50]  11.16,35.56 0 top
U$61  [R50]  11.06,48.36 0 top
U$62  [RSSI0]  50.04,48.91 90 top
U$63  [PWR0]  30.99,37.6 0 top
U$64  [01]  37.46,36.59 0 top
U$65  [10]  39.88,36.46 0 top
U$66  [SH0]  9.52,61.73 0 top
U$67  [RESET0]  77.22,35.57 0 top
U$68  [915MHZ0]  104.27,56.02 0 top
U$69  [ANTENNA1]  104.01,54.88 0 top
U$70  [RADIO2]  88.77,59.96 0 top
U$71  [RX1]  67.06,35.83 0 top
U$72  [TX0]  67.06,44.72 0 top
U$73  [#0]  64.39,45.35 0 top
U$74  [#1]  64.39,39.13 90 top
U$75  [R3]  64.39,40.4 90 top
U$76  [T2]  64.39,42.81 90 top
U$77  [C0]  64.39,41.54 90 top